# Altium PCB PCB1.PcbDoc
Units mm, origin at the board's own origin, x right, y up, seen from the top; angles counter-clockwise.
Board outline 48 x 48 mm, 4 copper layers (Top Copper, Signal Layer 1, Signal Layer 2, Bottom Copper), stack 1.57 mm thick; 134 components, 82 nets, 479 pads, 178 vias.
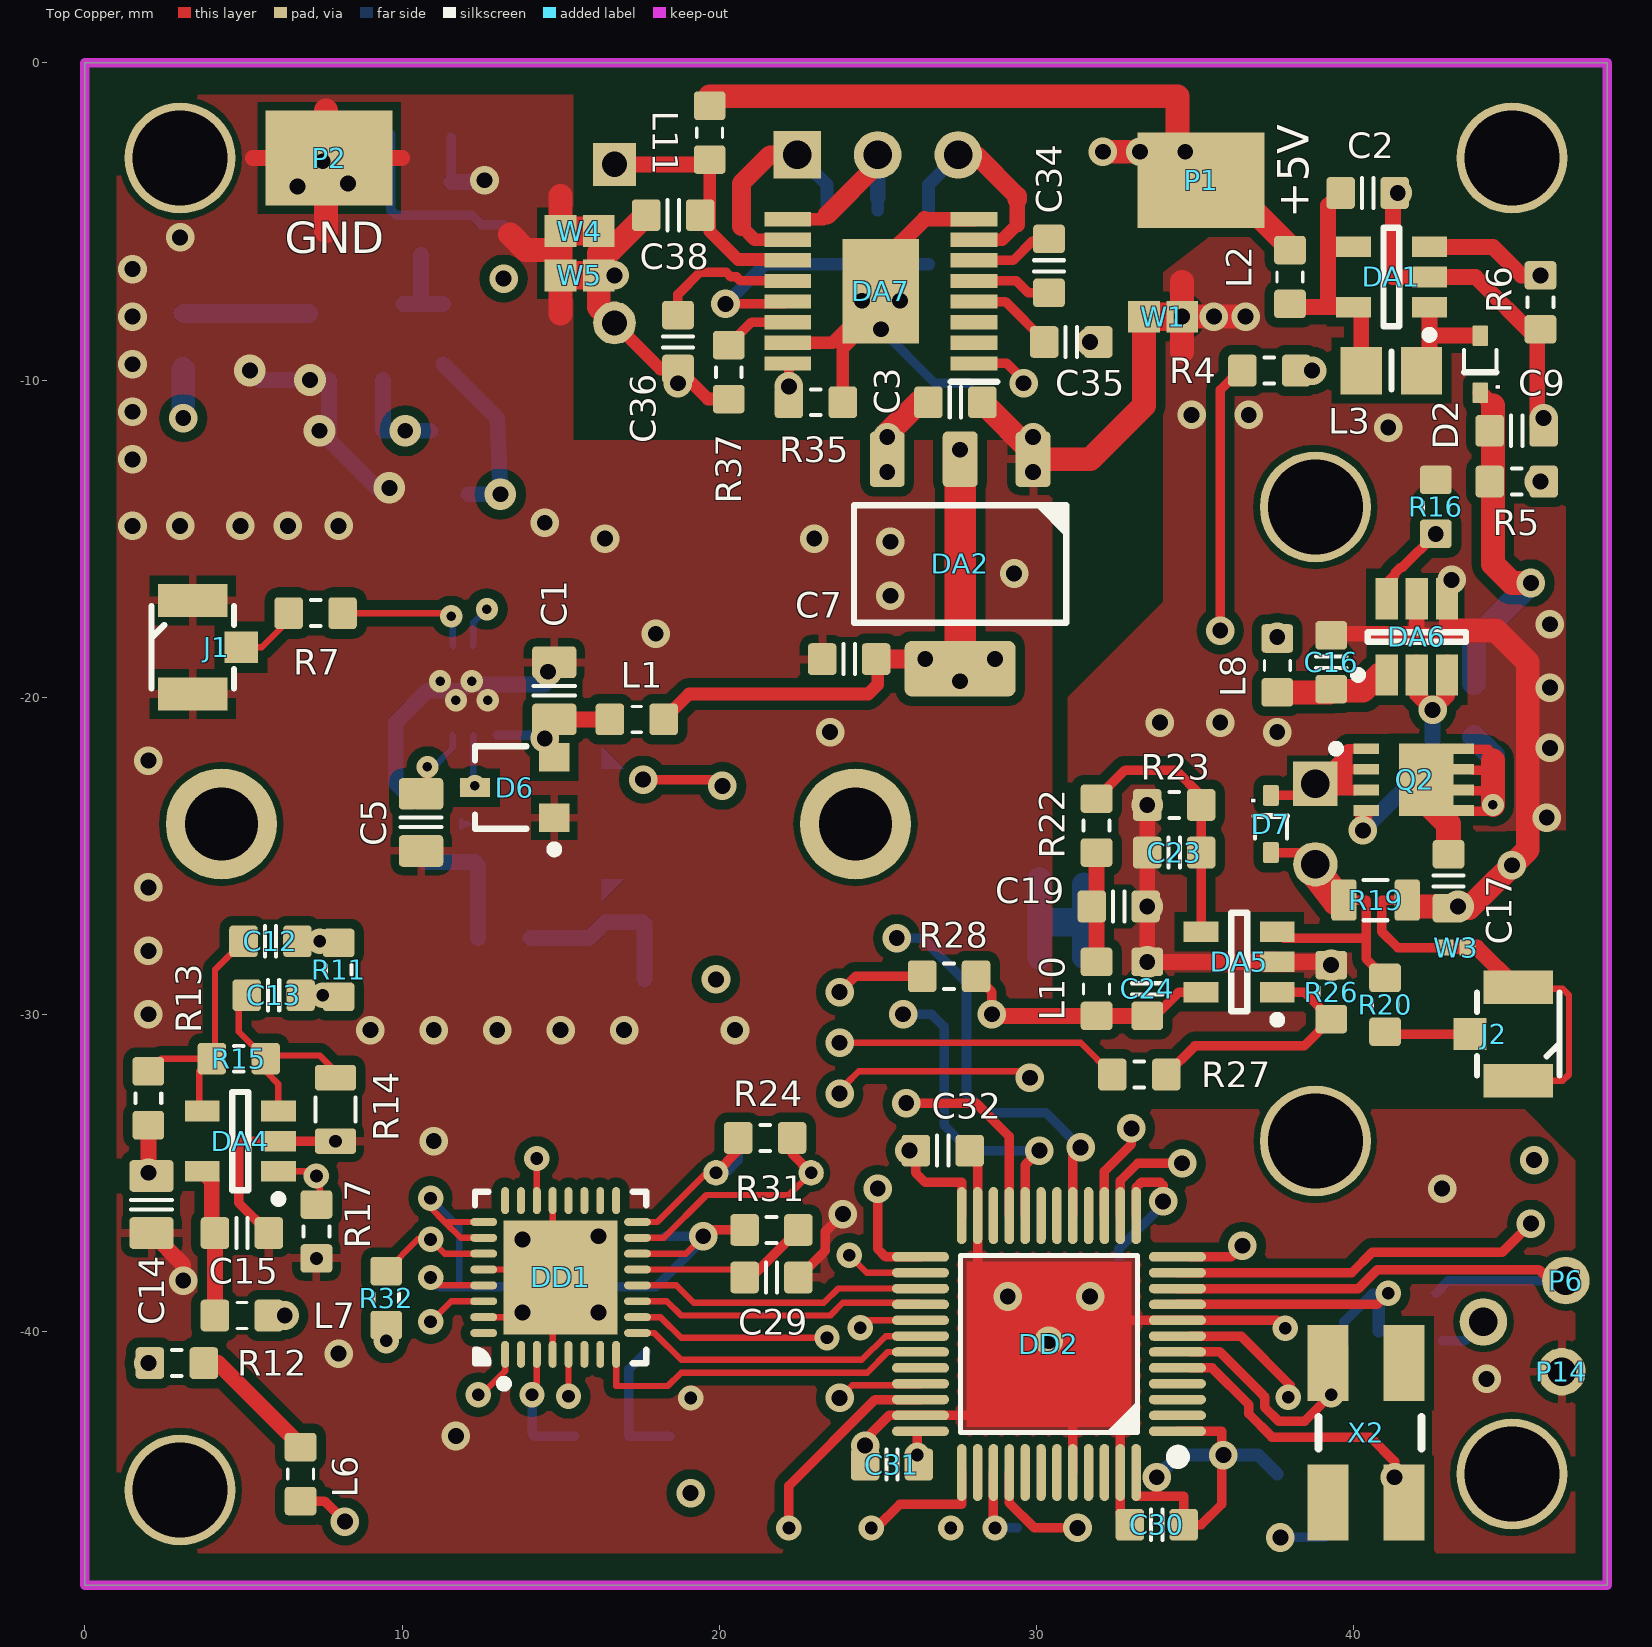
[diagram p0: Top Copper view]
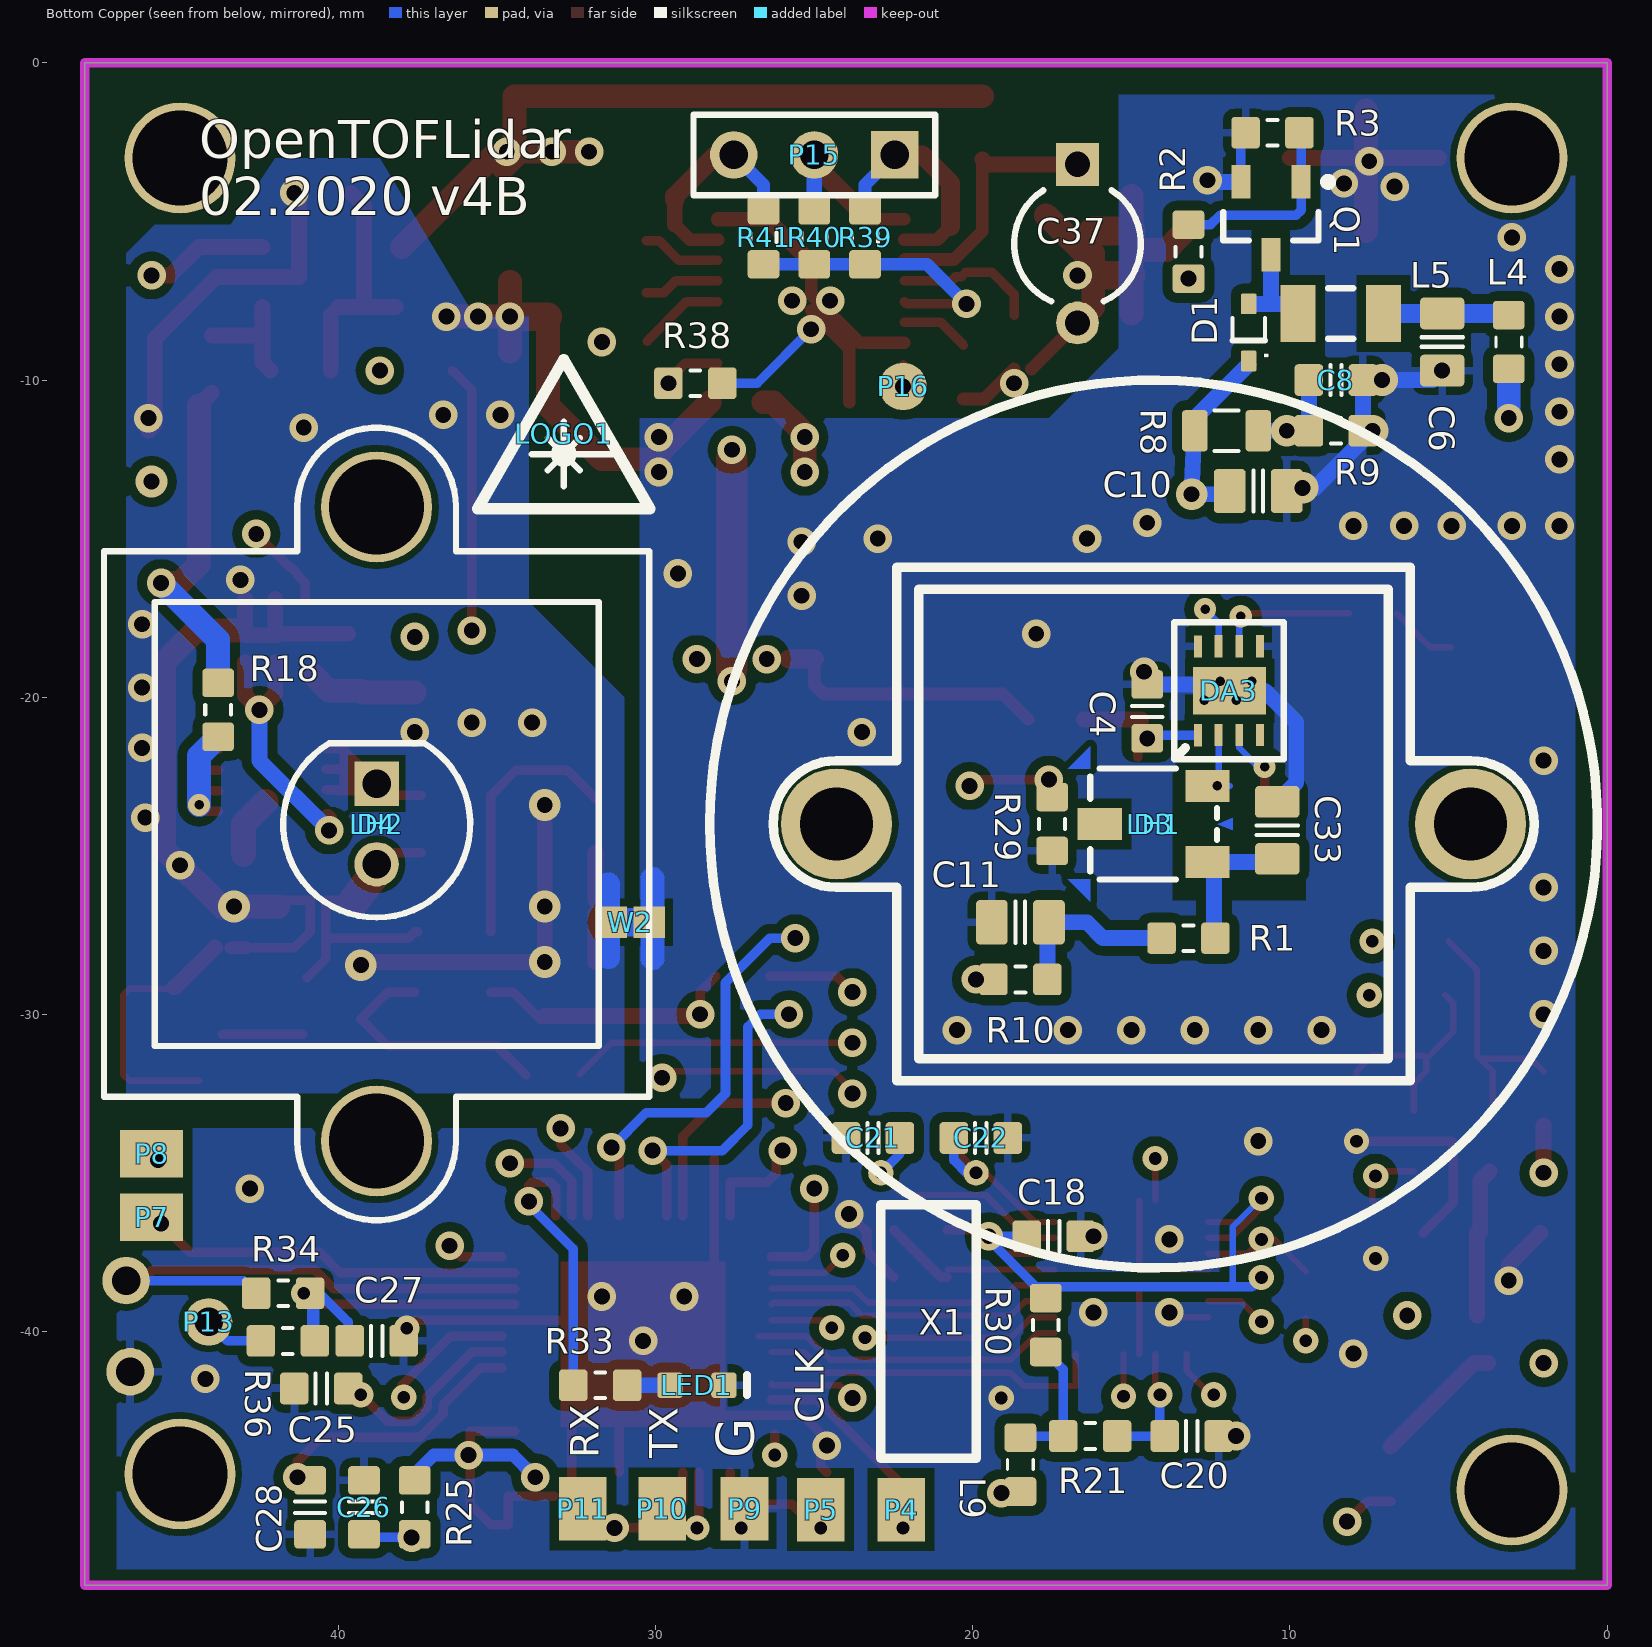
[diagram p1: Bottom Copper view, seen from below]
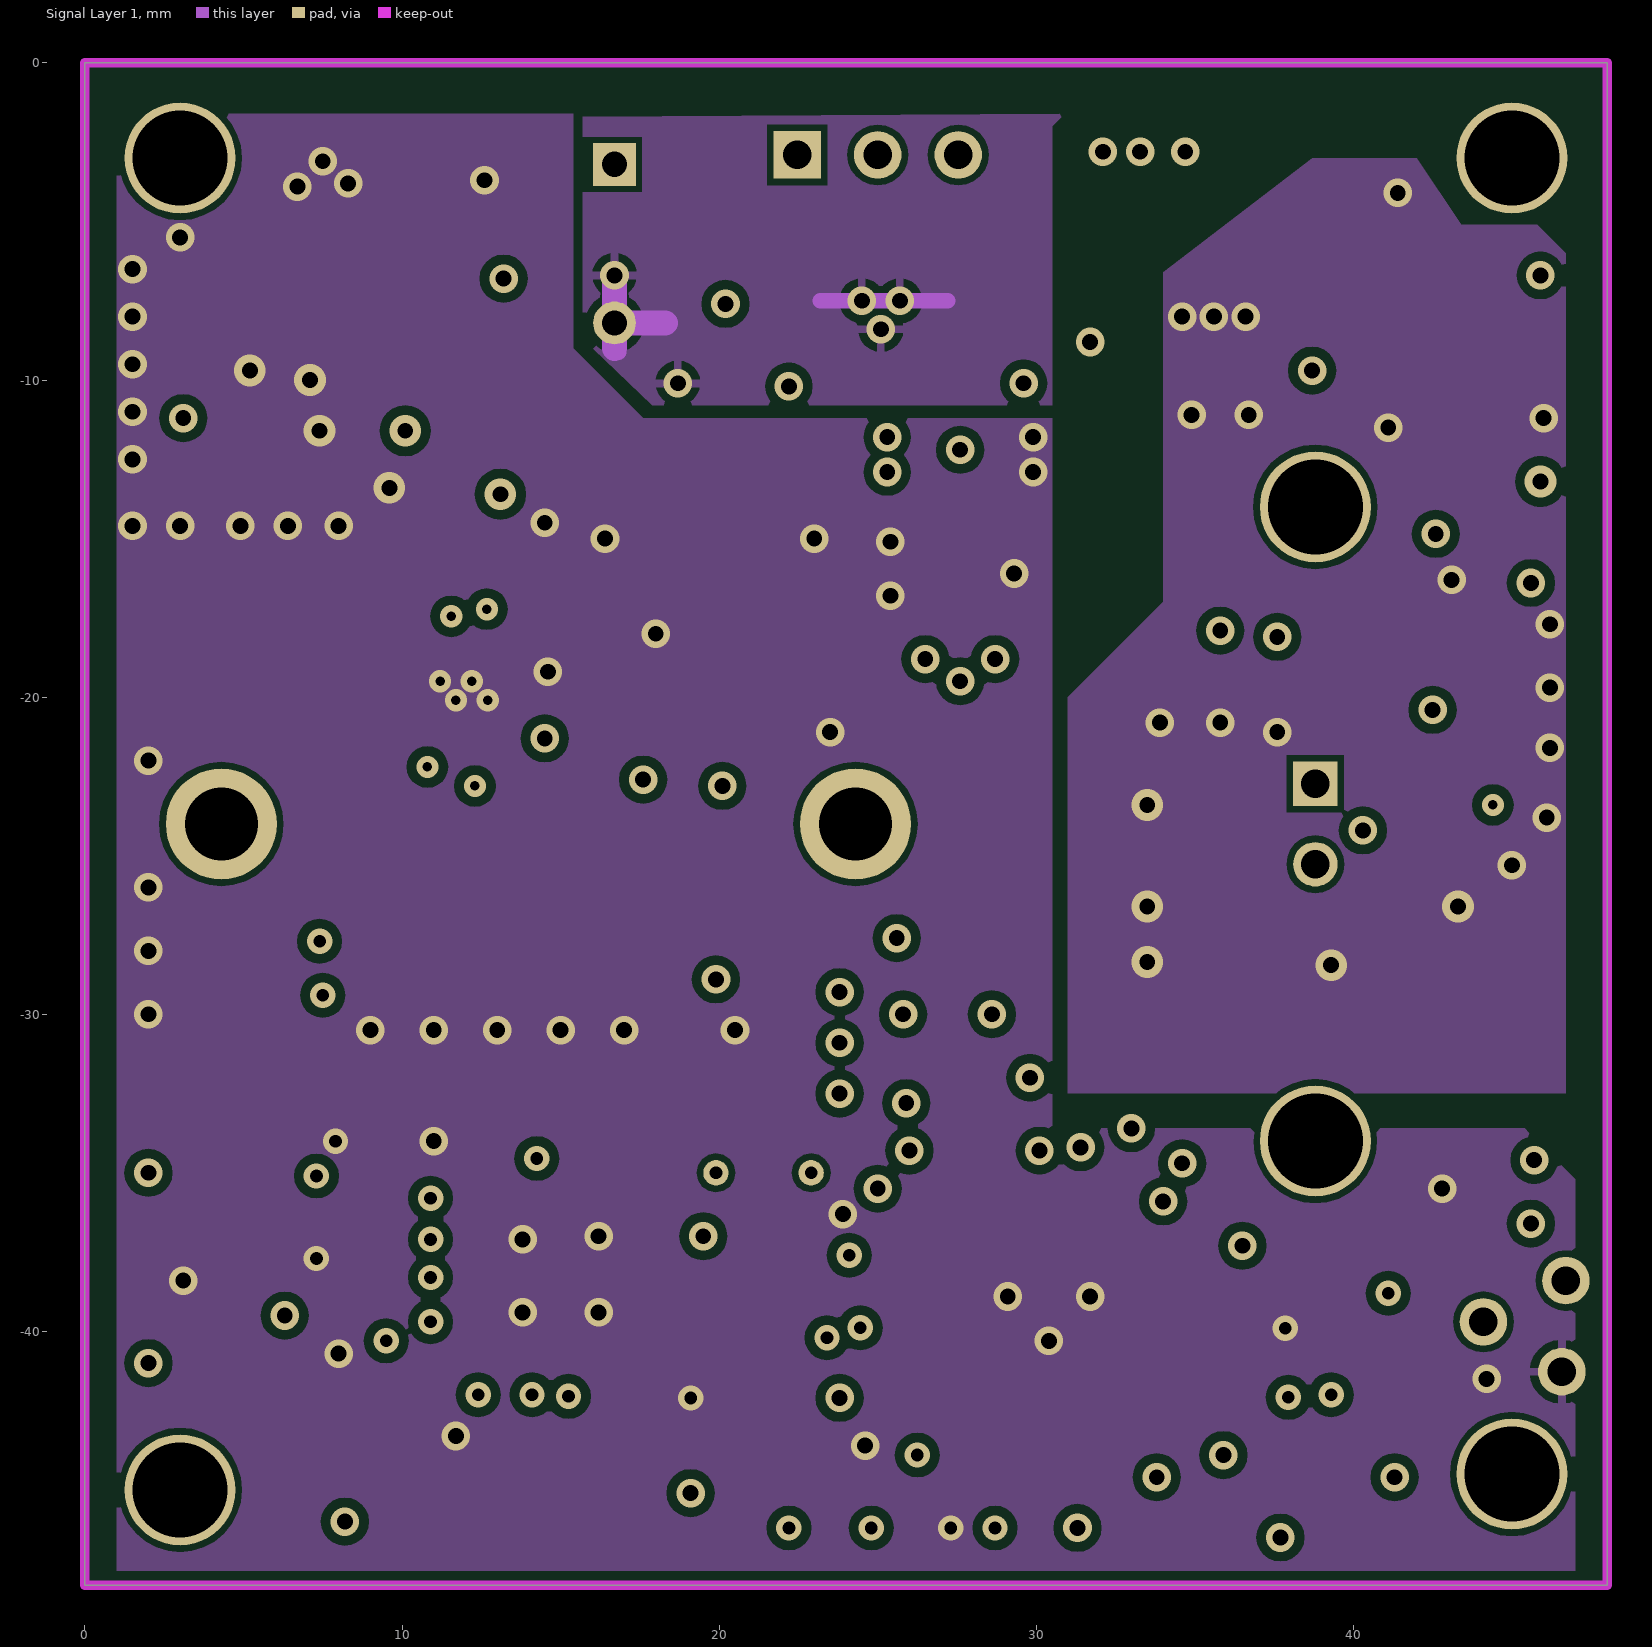
[diagram p2: Signal Layer 1]
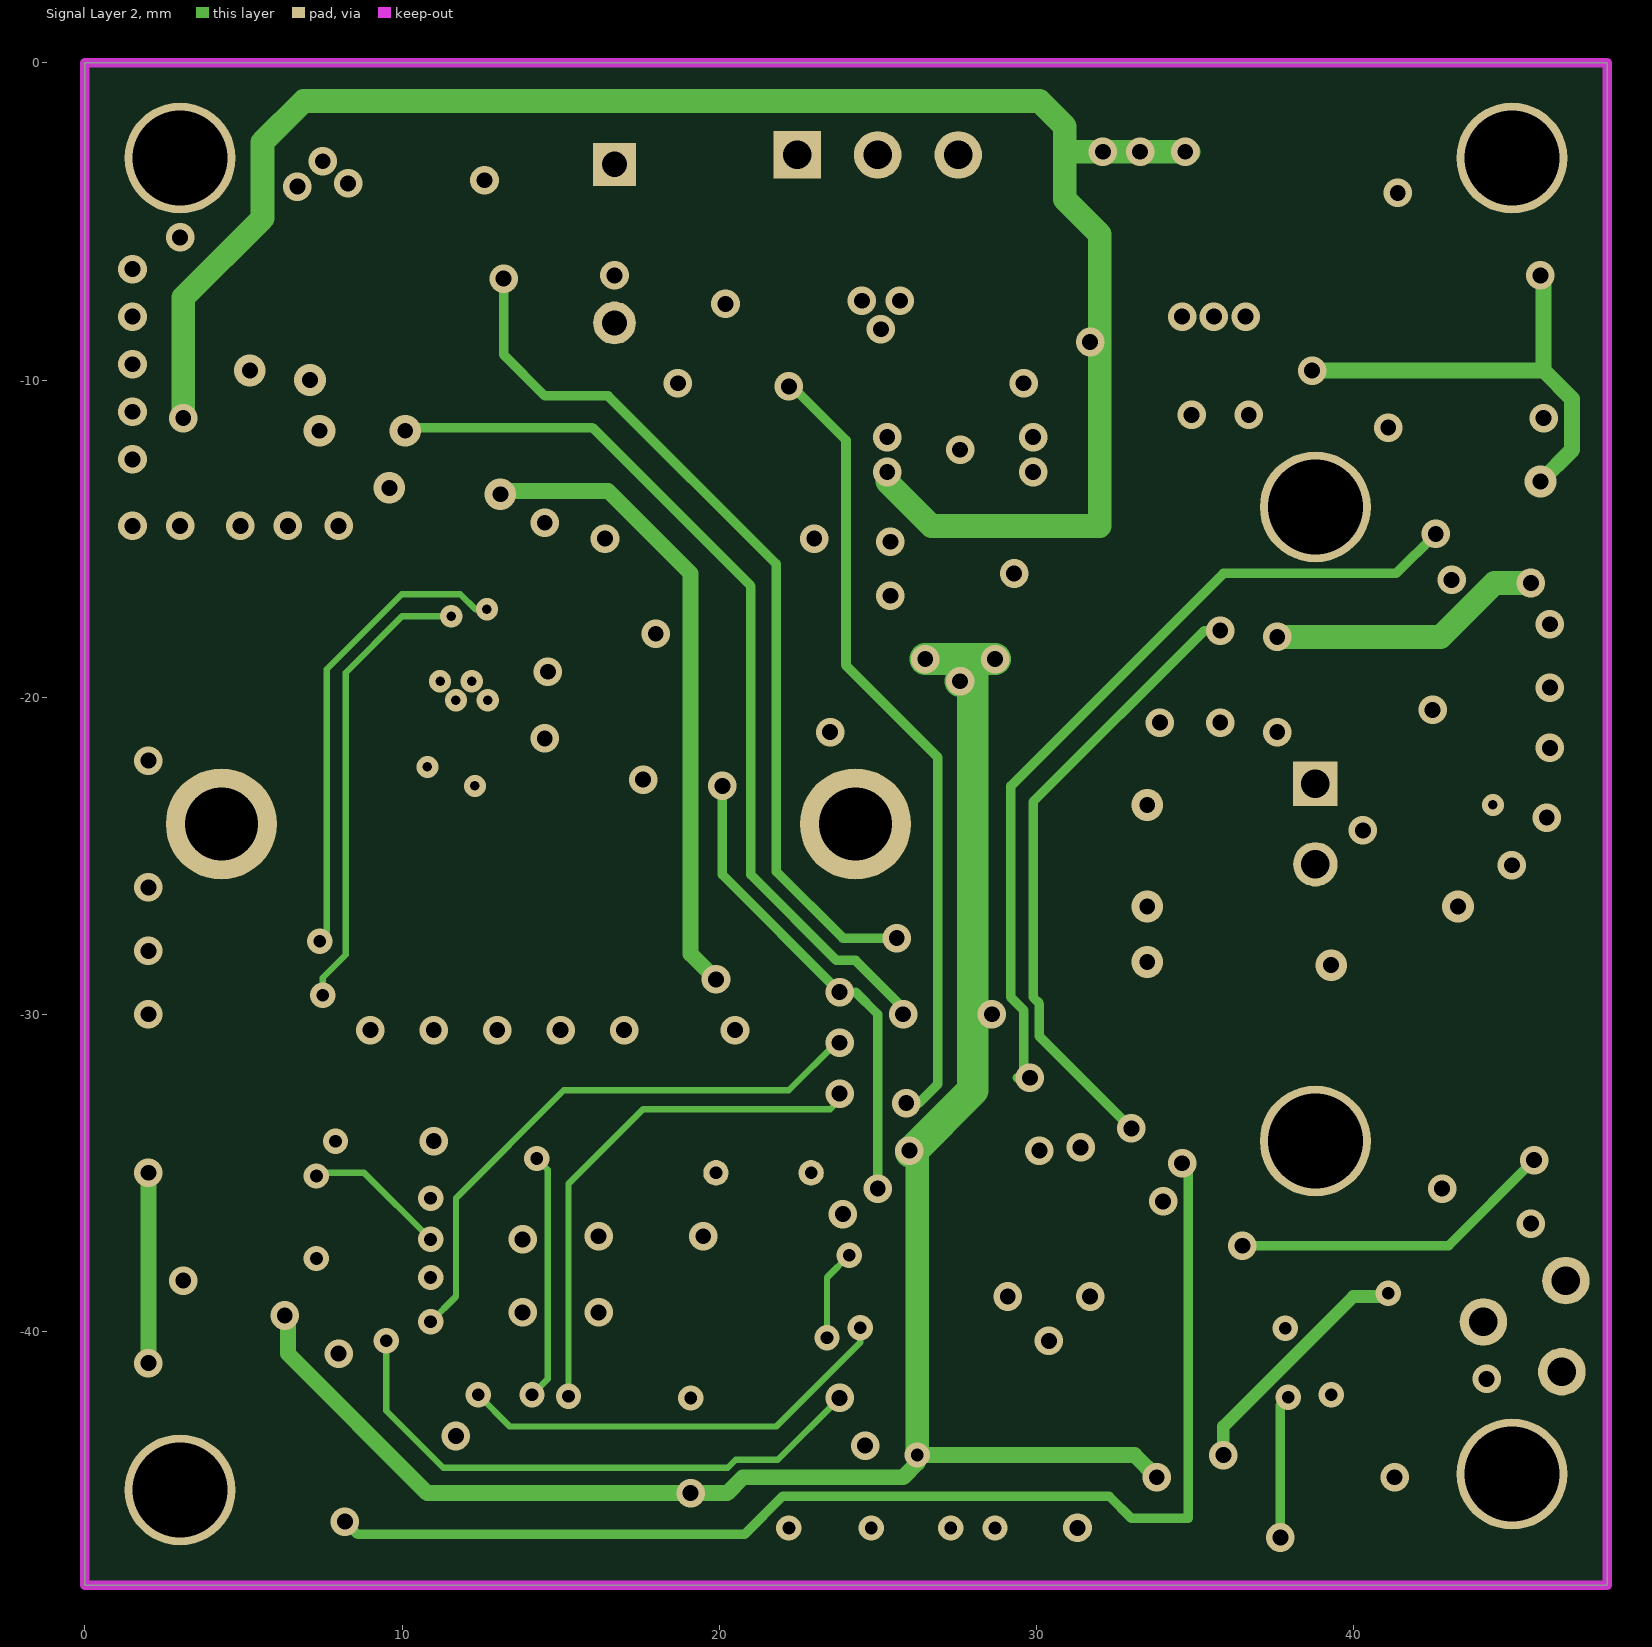
[diagram p3: Signal Layer 2]
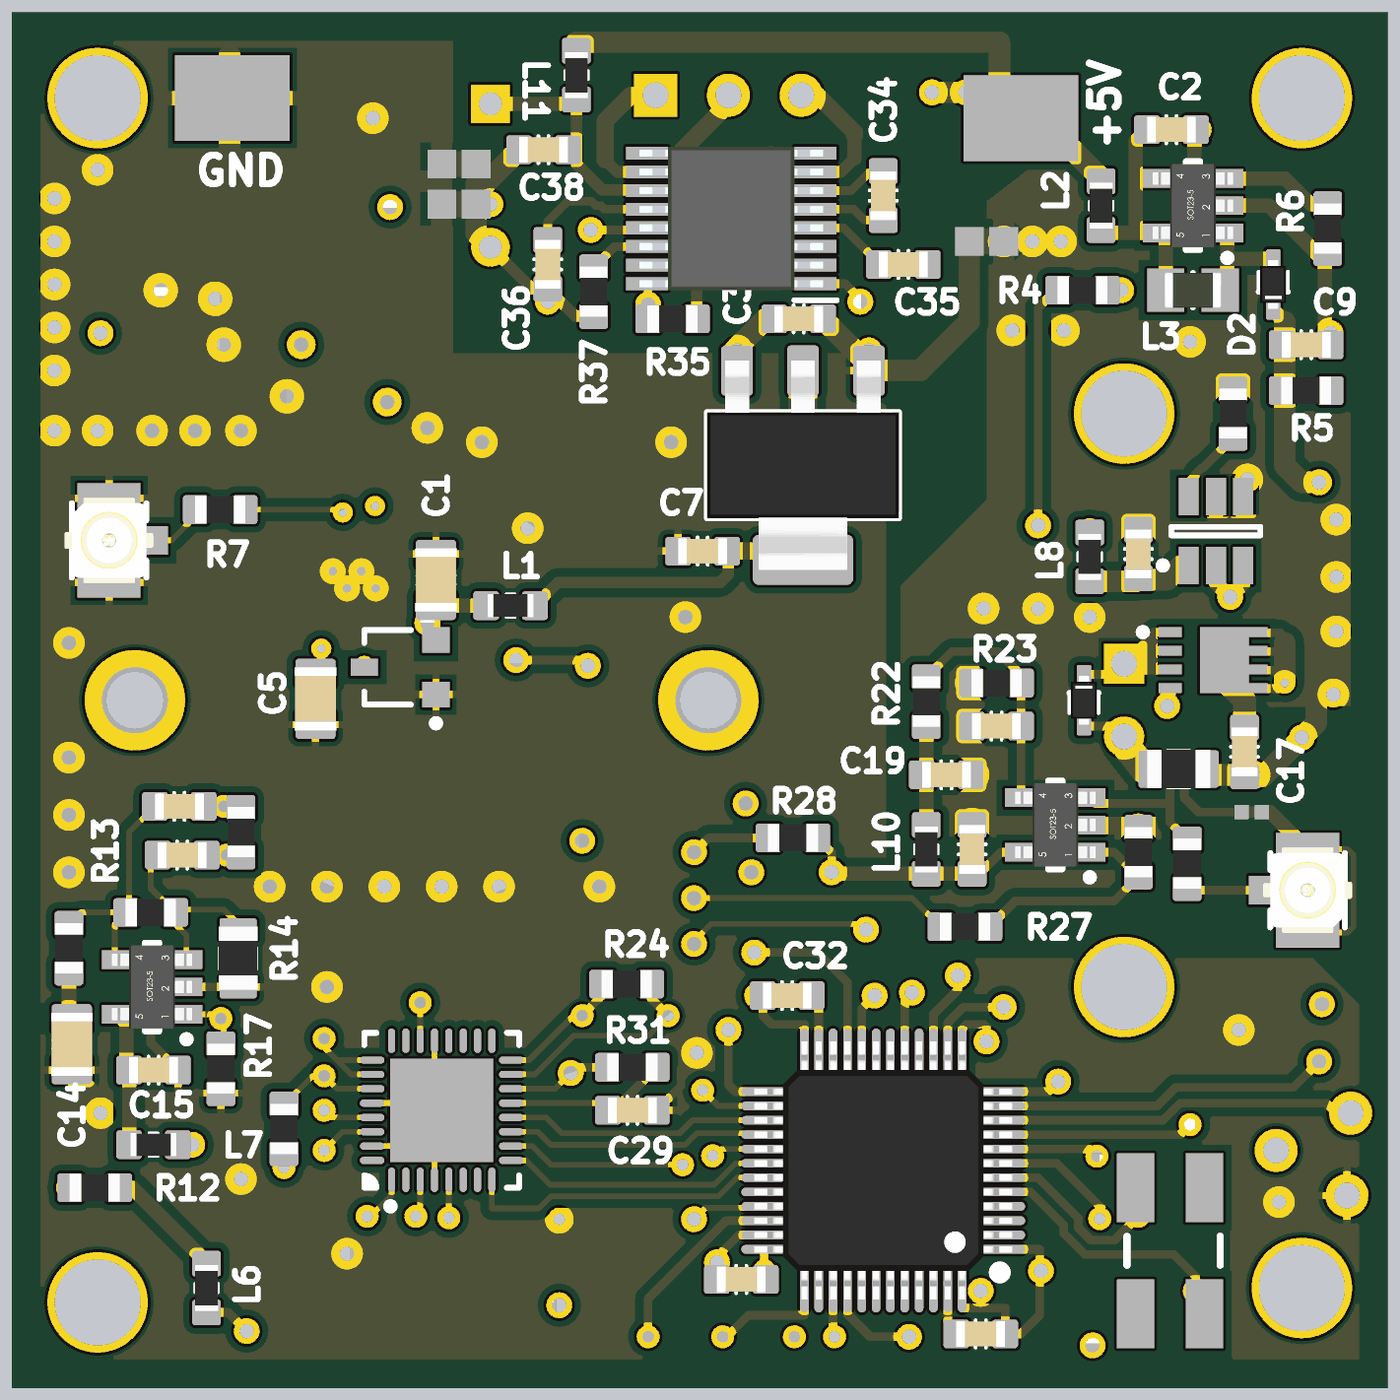
[diagram p4: 3D render of the assembled board from above, using the file's embedded part models]
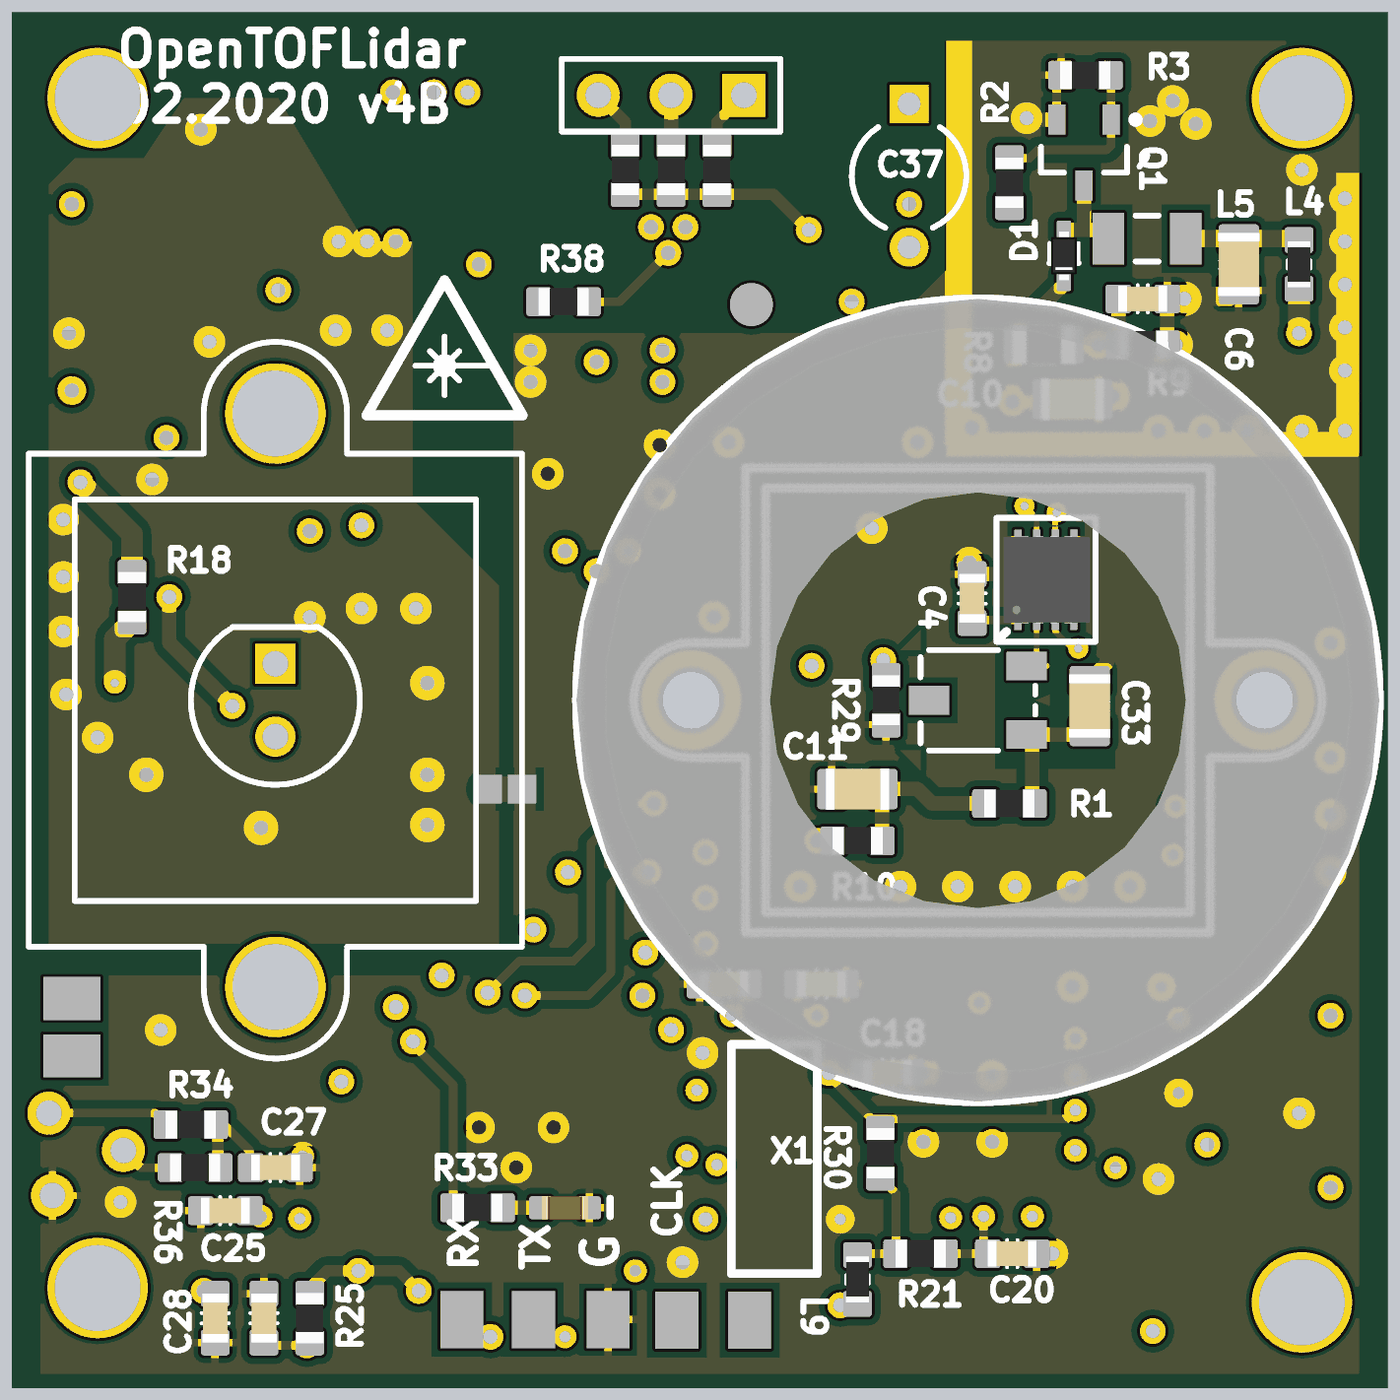
[diagram p5: 3D render of the assembled board from below, using the file's embedded part models]

## Layer stack, top to bottom
Top Mask: solder mask 0.015, Solder Resist, Dk 3.8
Top Copper: signal copper 0.035
Dielectric 1: prepreg 0.1, 2313, Dk 4.05
Signal Layer 1: signal copper 0.0175
Core: core 1.265, FR-4, Dk 4.5
Signal Layer 2: signal copper 0.0175
Dielectric 2: prepreg 0.1, 2313, Dk 4.05
Bottom Copper: signal copper 0.035
Bottom Mask: solder mask 0.015, Solder Resist, Dk 3.8

## Board outline
0,-48 48,-48 48,0 0,0

## Design rules (kind name [scope] priority, off if disabled: settings)
Clearance [All] p1: gap=0.2 except(0.3: Track-Poly SMDPad-Poly Via-Poly)
DiffPairsRouting [All] p1: maxlimit=0.254 minlimit=0.254 mostfreqgap=0.3 toplayer_minwidth=0.2 toplayer_maxwidth=0.5 toplayer_prefwidth=0.3 midlayer1_minwidth=0.2 midlayer1_maxwidth=0.5 midlayer1_prefwidth=0.3 midlayer2_minwidth=0.2 midlayer2_maxwidth=0.5 midlayer2_prefwidth=0.3 bottomlayer_minwidth=0.2 bottomlayer_maxwidth=0.5 bottomlayer_prefwidth=0.3 maxuncoupledlength=0.2
HoleSize [All] p1: absolutevalues=TRUE maxlimit=10 minlimit=0.3 maxpercent=80.000 minpercent=20.000
MinimumAnnularRing [All] p1: minimumring=0.19
PolygonConnect PolygonConnectGND [InNet('LGND')] p1: connectstyle=Direct reliefconductorwidth=0.254 reliefentries=4 polygonreliefangle="90 Angle" airgapwidth=0.254
PolygonConnect PolygonConnectGND2 [IsVia AND InNet('GND')] p2: connectstyle=Direct reliefconductorwidth=0.254 reliefentries=4 polygonreliefangle="90 Angle" airgapwidth=0.254
PolygonConnect PolygonConnect_1 [All] p3: connectstyle=Relief reliefconductorwidth=0.254 reliefentries=4 polygonreliefangle="90 Angle" airgapwidth=0.254
RoomDefinition Sheet1 [InComponentClass('Sheet1')] p1: confinementstyle=ConfineIn formatcopy=TRUE lockcomponents=FALSE outline -18.286,-70.225 40.769,-70.225 40.769,-58.541 -18.286,-58.541
RoutingVias [All] p1: holewidth=0.5 width=0.9 viastyle="Through Hole" minholewidth=0.3 minwidth=0.6 maxholewidth=10 maxwidth=12
SilkToSilkClearance [All] p1: silktosilkclearance=0.1
SolderMaskExpansion [All] p1: expansion=0.102
Width [All] p1: maxlimit=10 minlimit=0.2 preferedwidth=0.3
27 further rules are at their usual default settings.

## Classes and differential pairs
differential pair COMP: +COMP_P -COMP_N
differential pair OUT: +OUT_P -OUT_N

## Components (designator, comment, footprint, x,y, rotation, side; value= is the part's Value field where it differs from the comment)
C1 "1uF" CAPC2012X135N 14.8,-19.8 r270 top
C2 "10uF" CAPC1608X90N 40.45,-4.1 r180 top
C3 "100nF" CAPC1608X90N 27.45,-10.7 r180 top
C4 "100nF" CAPC1608X90N 14.5,-20.45 r270 bottom
C5 "1uF" CAPC2012X135N 10.6,-23.95 r90 top
C6 "1uF" CAPC2012X135N 5.2,-8.8 r270 bottom
C7 "2.2uF" CAPC1608X90N 24.1,-18.8 r0 top
C8 "100pF" CAPC1608X90N 8.55,-10 r180 bottom
C9 "10uF" CAPC1608X90N 45.15,-11.6 r180 top
C10 "10nF" CAPC2012X135N 11,-13.5 r0 bottom
C11 "10nF" CAPC2012X135N 18.5,-27.1 r180 bottom
C12 "10nF" CAPC1608X90N 5.85,-27.7 r0 top
C13 "10nF" CAPC1608X90N 5.95,-29.4 r0 top
C14 "1uF" CAPC2012X135N 2.1,-36 r270 top
C15 "100nF" CAPC1608X90N 4.95,-36.9 r0 top
C16 "10uF" CAPC1608X90N 39.3,-18.9 r270 top
C17 "20nF" CAPC1608X90N 43,-25.8 r90 top
C18 "10uF" CAPC1608X90N 17.45,-37 r0 bottom
C19 "1uF" CAPC1608X90N 32.6,-26.6 r180 top
C20 "10uF" CAPC1608X90N 13.1,-43.3 r0 bottom
C21 "10pF" CAPC1608X90N 23.15,-33.9 r180 bottom
C22 "10pF" CAPC1608X90N 19.75,-33.9 r0 bottom
C23 "100nF" CAPC1608X90N 34.35,-24.9 r0 top
C24 "100nF" CAPC1608X90N 33.5,-29.2 r270 top
C25 "10pF" CAPC1608X90N 40.55,-41.8 r0 bottom
C26 "100nF" CAPC1608X90N 39.2,-45.55 r270 bottom
C27 "100nF" CAPC1608X90N 38.8,-40.3 r0 bottom
C28 "10pF" CAPC1608X90N 40.9,-45.55 r270 bottom
C29 "100nF" CAPC1608X90N 21.65,-38.3 r180 top
C30 "100nF" CAPC1608X90N 33.8,-46.1 r0 top
C31 "100nF" CAPC1608X90N 25.45,-44.2 r0 top
C32 "100nF" CAPC1608X90N 27.05,-34.3 r180 top
C33 "10nF" CAPC2012X135N 10.4,-24.2 r270 bottom
C34 "100nF" CAPC1608X90N 30.4,-6.4 r90 top
C35 "100nF" CAPC1608X90N 31.1,-8.8 r180 top
C36 "2.2uF" CAPC1608X90N 18.7,-8.8 r90 top
C37 "Cap2" CAPR5-4X5 16.7,-5.7 r270 bottom
C38 "1uF" CAPC1608X90N 18.55,-4.8 r180 top
D1 "BAS521" SOD523F 11.3,-8.5 r90 bottom
D2 "BAS5202" SOD523F 44,-9.5 r90 top
D3 "MTAPD-07" LCC3 14.3,-24 r90 bottom locked (schematic designator D1)
D4 "Laser SPL PL90_3" SPL_PL90 38.8,-24 r270 bottom locked
D6 "BAV99" SOT-23 13.55,-22.85 r90 top
D7 "BAS5202" SOD523F 37.4,-24 r270 top
DA1 "MIC2288YD5-TR" SOT23-5 41.2,-6.75 r180 top
DA2 "LD1117S33TR" SOT223 27.6,-15.8 r270 top
DA3 "MAX3658" TDFN-8_0.65 12.9,-19.8 r90 bottom
DA4 "ADCMP600" SOT23-5 4.9,-34 r180 top
DA5 "ADCMP600" SOT23-5 36.4,-28.35 r180 top
DA6 "UCC27511DBVR" SOT23-6_M 42,-18.1 r90 top
DA7 "DRV11873PWPR" SOP65P640X120-17N 25.1,-7.2 r180 top
DD1 "TDC-GP21" "QFN32 5x5mm" 15,-38.3 r90 top
DD2 "STM32F303CBT6" LQFP-48_N 30.4,-40.4 r180 top locked
J1 "U.FL" "TE C-1909763" 3.4,-18.425 r90 top
J2 "U.FL" "TE C-1909763" 45.2,-30.625 r270 top
L1 "BEAD" INDC1608N 17.4,-20.7 r180 top
L2 "BEAD" INDC1608N 38,-6.75 r90 top
L3 "Inductor" V0805HD 41.2,-9.7 r0 top
L4 "BEAD" INDC1608N 3.1,-8.8 r90 bottom
L5 "Inductor" INDC3216 8.4,-7.9 r0 bottom
L6 "BEAD" INDC1608N 6.8,-44.5 r90 top
L7 "BEAD" INDC1608N 4.95,-39.5 r180 top
L8 "BEAD" INDC1608N 37.6,-19 r270 top
L9 "BEAD" INDC1608N 18.5,-44.2 r270 bottom
L10 "BEAD" INDC1608N 31.9,-29.2 r90 top
L11 "BEAD" INDC1608N 19.7,-2.2 r270 top
LED1 "LED" LED_0603 28.7,-41.7 r180 bottom
LH1 "CS Lens Holder" "Lens Holder CS" 14.3,-24 r180 bottom locked
LH2 "Lens Holder" LENS_HOLDER_20MM_ADJ 38.8,-24 r90 bottom locked
LOGO1 "LASER RADIATION" LaserWarning_Small 32.9,-11.7 r180 bottom
P1 "Power pad" Ext_power_pad 33.2,-3.7 r90 top
P2 "Power pad" Ext_power_pad 5.7,-3 r90 top
P4 "Pad" Ext_pad_2 22.26,-44.12 r180 bottom
P5 "Pad" Ext_pad_2 24.8,-44.12 r180 bottom
P6 "Pad" Ext_hole 46.7,-38.4 r0 top
P7 "Pad" Ext_pad_2 44.4,-36.4 r270 bottom
P8 "Pad" Ext_pad_2 44.4,-34.4 r270 bottom
P9 "Pad" Ext_pad_2 27.2,-44.1 r180 bottom
P10 "Pad" Ext_pad_2 29.8,-44.1 r180 bottom
P11 "Pad" Ext_pad_2 32.3,-44.1 r180 bottom
P13 "Pad" Ext_hole 44.1,-39.7 r270 bottom
P14 "Pad" Ext_hole 46.573,-41.273 r0 top
P15 "Motor" HDR1X3 22.46,-2.9 r0 bottom
P16 "Pad" Ext_pad_small 22.2,-8.7 r180 bottom
Q1 "BSS131" INF-PG-SOT23_N 10.6,-4.9 r270 bottom
Q2 "BSZ165N04NS G" INF-PG-TSDSON-8-1_A_V 41.942,-22.6 r180 top
R1 "1K" RESC1608X55N 13.2,-27.6 r0 bottom
R2 "47" RESC1608X55N 13.2,-5.95 r90 bottom
R3 "47K" RESC1608X55N 10.55,-2.2 r0 bottom
R4 "10K" RESC1608X55N 37.35,-9.7 r0 top
R5 "47K" RESC1608X55N 45.15,-13.2 r180 top
R6 "4.7K" RESC1608X55N 45.9,-7.55 r90 top
R7 "47" RESC1608X55N 7.275,-17.35 r0 top
R8 "2M" RESC2012X70N 12,-11.6 r0 bottom
R9 "20K" RESC1608X55N 8.55,-11.6 r180 bottom
R10 "4.7K" RESC1608X55N 18.5,-28.9 r0 bottom
R11 "NC" RESC1608X55N 8,-28.6 r90 top
R12 "82" RESC1608X55N 2.9,-41 r0 top
R13 "4.7K" RESC1608X55N 2,-32.65 r270 top
R14 "20K" RESC2012X70N 7.9,-33 r90 top
R15 "1K" RESC1608X55N 4.85,-31.4 r180 top
R16 "1K" RESC1608X55N 42.6,-14 r270 top
R17 "1K" RESC1608X55N 7.3,-36.85 r90 top
R18 "270" RESC1608X55N 43.8,-20.4 r90 bottom
R19 "0.1" RESC2012X70N 40.7,-26.4 r180 top
R20 "0" RESC1608X55N 41,-29.7 r90 top
R21 "22" RESC1608X55N 16.3,-43.3 r180 bottom
R22 "100K" RESC1608X55N 31.9,-24.05 r90 top
R23 "4.7K" RESC1608X55N 34.35,-23.4 r180 top
R24 "10M" RESC1608X55N 21.45,-33.9 r0 top
R25 "10K" RESC1608X55N 37.6,-45.55 r270 bottom
R26 "1K" RESC1608X55N 39.3,-29.3 r270 top
R27 "0" RESC1608X55N 33.25,-31.9 r180 top
R28 "10K" RESC1608X55N 27.25,-28.8 r180 top
R29 "10K NTC" RESC1608X55N 17.5,-24 r90 bottom
R30 "0" RESC1608X55N 17.7,-39.8 r90 bottom
R31 "4.7k" RESC1608X55N 21.65,-36.8 r0 top
R32 "NC" RESC1608X55N 9.5,-38.95 r90 top
R33 "1K" RESC1608X55N 31.75,-41.7 r0 bottom
R34 "NC" RESC1608X55N 41.75,-38.8 r0 bottom
R35 "4.7K" RESC1608X55N 23.05,-10.7 r0 top
R36 "0" RESC1608X55N 41.6,-40.3 r0 bottom
R37 "3.3K" RESC1608X55N 20.3,-9.75 r270 top
R38 "0" RESC1608X55N 28.75,-10.1 r180 bottom
R39 "1K" RESC1608X55N 23.4,-5.5 r270 bottom
R40 "1K" RESC1608X55N 25,-5.5 r270 bottom
R41 "1K" RESC1608X55N 26.6,-5.5 r270 bottom
W1 "NET connector" "Net connector" 34,-8 r180 top net-tie
W2 "NET connector" "Net connector" 30.8,-27.1 r180 bottom net-tie
W3 "NET connector" "Net connector2" 43.3,-27.9 r0 top net-tie
W4 "NET connector" "Net connector" 15.6,-5.3 r0 top net-tie
W5 "NET connector" "Net connector" 15.6,-6.7 r0 top net-tie
X1 "32kHz" QUARTZ_32K 19.9,-35 r90 bottom
X2 "Quartz" "SX-6 QUARTZ" 40.4,-43.2 r270 top

## Footprints (in the part's own frame and the unit in brackets; to place one, negate y for a bottom-side part, rotate by r counter-clockwise, add the part's x,y. Pads: shape width x height; smd on the part's side, far side on the other; paste and mask are expansions set on the pad)
CAPC1608X90N [mm] "Chip Capacitor, Body 1.6x0.8mm, EIA 0603, IPC Medium Density"
  round 0.254 on Mech15: 0(0,0)
  rrect25% 0.9x1 smd: 1(-0.85,0) 2(0.85,0)
  Top Copper pour cut-out: -0.6,0.5 -0.4,0.7 0.4,0.7 0.6,0.5 0.6,-0.5 0.4,-0.7 -0.4,-0.7 -0.6,-0.5
  silkscreen extent -0.18,-0.48 0.18,0.48, body extent -0.85,-0.45 0.85,0.45, height 0.89
CAPC2012X135N [mm] "Chip Capacitor, Body 2.0x1.2mm, EIA 0805, IPC Medium Density"
  round 0.254 on Mech15: 0(0,0)
  rrect25% 1x1.4 smd: 1(-0.9,0) 2(0.9,0)
  Top Copper pour cut-out: -0.675,0.7 -0.475,0.9 0.475,0.9 0.675,0.7 0.675,-0.7 0.475,-0.9 -0.475,-0.9 -0.675,-0.7
  silkscreen extent -0.15,-0.65 0.15,0.65, body extent -1.1,-0.72 1.1,0.73, height 1.34
CAPR5-4X5 [mm] "Capacitor; 2 Leads"
  rect 1.35x1.35 hole 0.8: 1(-2.5,0)
  round 1.35 hole 0.8: 2(2.5,0)
  silkscreen extent -1.69,-2 1.82,2
Ext_hole [mm] "Hole for wire (0.6)"
  round 1.5 hole 0.9: 1(0,0)
Ext_pad_2 [mm] "Pad for wire(1.5x2)"
  rect 1.5x2 smd: 1(0,-1.5)
Ext_pad_small [mm] "Pad for wire(1.5mm round)"
  round 1.5 smd: 1(0,-1.5)
Ext_power_pad [mm] "Pad for wire(4x3)"
  rect 3x4 smd: 1(0,-2)
HDR1X3 [mm] "Connector; Header; 3 Position"
  rect 1.5x1.5 hole 0.9: 1(0,0)
  round 1.5 hole 0.9: 2(2.54,0) 3(5.08,0)
  silkscreen extent -1.27,-1.27 6.35,1.27
INDC1608N [mm] "Chip bead, Body 1.6x0.8mm, 0603, IPC Medium Density"
  round 0.254 on Mech15: 0(0,0)
  rrect25% 0.9x1 smd: 1(-0.85,0) 2(0.85,0)
  Top Copper pour cut-out: -0.4,0.6 0.4,0.6 0.4,-0.6 -0.4,-0.6
  silkscreen extent -0.15,-0.41 0.15,0.41, body extent -0.8,-0.4 0.8,0.4, height 0.79
INDC3216 [mm] "Chip Inductor, Body 3.2x1.6mm, IPC High Density"
  rect 1.1x1.8 smd: 1(-1.35,0) 2(1.35,0)
  silkscreen extent -0.4,-0.8 0.4,0.8, body extent -1.7,-0.9 1.7,0.9, height 0.55
INF-PG-SOT23_N [mm] "SOT23, 3-Leads, Body 2.9x1.3mm, Pitch 0.95mm, IPC Medium Density"
  rect 1.05x0.6 smd: 1(-1.15,0.95) 2(-1.15,-0.95) 3(1.15,0)
  silkscreen extent -1.27,-1.5 0.7,1.92, body extent -0.7,-1.5 0.7,1.5, height 1.1
INF-PG-TSDSON-8-1_A_V [mm] "TSDSON, 8-Leads, Body 3.3x3.3mm, Pitch 0.65mm"
  rect 0.8x0.34 smd: 1(1.538,-0.975) 2(1.538,-0.325) 3(1.538,0.325) 4(1.538,0.975)
  rect 0.65x0.34 smd: 5(-1.538,0.975) 6(-1.538,0.325) 7(-1.538,-0.325) 8(-1.538,-0.975)
  rect 1.71x2.29 smd: 8(-0.358,0)
  silkscreen extent 2.36,-1.1 2.61,-0.85, body extent -1.65,-1.65 1.65,1.65, height 1
LaserWarning_Small [mm]
  silkscreen extent -2.72,-2.36 2.72,2.35
LCC3 [mm] "LCC3 APD"
  rect 1x1.4 smd: A(1.2,-1.7) C(-1.2,-1.7) NC(0,1.7)
  Top Copper region: -0.2,-2.5 0,-2 0.2,-2.5
  Top Copper region: 1.75,2 1.75,2.7 2.45,2
  Top Copper region: -1.75,2 -1.75,2.7 -2.45,2
  silkscreen extent -1.75,-2 1.75,2, body extent -1.7,-2 1.7,2, height 1
LED_0603 [mm] "LED_0603"
  round 0.254 on Mech15: 0(0,0)
  rrect25% 0.8x0.8 smd: 1(-0.85,0) 2(0.85,0)
  Top Copper pour cut-out: -0.5,0.5 0.5,0.5 0.5,-0.5 -0.5,-0.5
  silkscreen extent 1.58,-0.3 1.58,0.33, body extent -0.8,-0.4 0.8,0.4, height 0.75
"Lens Holder CS" [mm]
  round 3.5 hole 2.3: M2(-10,0) M2(10,0)
  silkscreen extent -14,-14 14,14, body extent -14,-14 14,14, height 14.7
LENS_HOLDER_20MM_ADJ [mm] "Holder for M12 lens 20mm"
  round 3.5 hole 3: M2(-10,0) M2(10,0)
  silkscreen extent -12.5,-8.6 12.5,8.6
LQFP-48_N [mm] "Thin QFP, 48-Leads, Body 7x7mm, Pitch 0.5mm, IPC Medium Density"
  round 1 on Mech15: 0(0,0)
  oval 1.8x0.3 smd: 1(-4.05,2.75) 2(-4.05,2.25) 3(-4.05,1.75) 4(-4.05,1.25) 5(-4.05,0.75) 6(-4.05,0.25) 7(-4.05,-0.25) 8(-4.05,-0.75) 9(-4.05,-1.25) 10(-4.05,-1.75) 11(-4.05,-2.25) 12(-4.05,-2.75) 25(4.05,-2.75) 26(4.05,-2.25) 27(4.05,-1.75) 28(4.05,-1.25) 29(4.05,-0.75) 30(4.05,-0.25) 31(4.05,0.25) 32(4.05,0.75) 33(4.05,1.25) 34(4.05,1.75) 35(4.05,2.25) 36(4.05,2.75)
  oval 0.3x1.8 smd: 13(-2.75,-4.05) 14(-2.25,-4.05) 15(-1.75,-4.05) 16(-1.25,-4.05) 17(-0.75,-4.05) 18(-0.25,-4.05) 19(0.25,-4.05) 20(0.75,-4.05) 21(1.25,-4.05) 22(1.75,-4.05) 23(2.25,-4.05) 24(2.75,-4.05) 37(2.75,4.05) 38(2.25,4.05) 39(1.75,4.05) 40(1.25,4.05) 41(0.75,4.05) 42(0.25,4.05) 43(-0.25,4.05) 44(-0.75,4.05) 45(-1.25,4.05) 46(-1.75,4.05) 47(-2.25,4.05) 48(-2.75,4.05)
  silkscreen extent -4.25,-2.79 2.79,3.75, body extent -4.5,-4.5 4.5,4.5, height 1.59
"Net connector" [mm]
  rect 1x1 smd mask+0: 1(-0.6,0) 2(0.6,0)
  Top Copper lines w0.9: 0.6,0 -0.6,0
"Net connector2" [mm]
  rect 0.5x0.5 smd mask+0: 1(-0.4,0) 2(0.3,0)
  Top Copper lines w0.4: -0.4,0 0.1,0
"QFN32 5x5mm" [mm] "HVQFN, 32-Leads, Body 5.00x5.00mm, Pitch 0.50mm, Thermal Pad 3.60x3.60mm, IPC Medium Density"
  oval 0.85x0.25 smd: 1(-2.425,1.75) 2(-2.425,1.25) 3(-2.425,0.75) 4(-2.425,0.25) 5(-2.425,-0.25) 6(-2.425,-0.75) 7(-2.425,-1.25) 8(-2.425,-1.75) 17(2.425,-1.75) 18(2.425,-1.25) 19(2.425,-0.75) 20(2.425,-0.25) 21(2.425,0.25) 22(2.425,0.75) 23(2.425,1.25) 24(2.425,1.75)
  oval 0.25x0.85 smd: 9(-1.75,-2.425) 10(-1.25,-2.425) 11(-0.75,-2.425) 12(-0.25,-2.425) 13(0.25,-2.425) 14(0.75,-2.425) 15(1.25,-2.425) 16(1.75,-2.425) 25(1.75,2.425) 26(1.25,2.425) 27(0.75,2.425) 28(0.25,2.425) 29(-0.25,2.425) 30(-0.75,2.425) 31(-1.25,2.425) 32(-1.75,2.425)
  rect 3.6x3.6 smd: 33(0,0)
  silkscreen extent -3.47,-2.7 2.7,2.7, body extent -2.55,-2.55 2.55,2.55, height 0.85
QUARTZ_32K [mm]
  round 0.8 hole 0.4: 1(0,3) 2(0,0)
  silkscreen extent -9,0 -1,3, body extent -9,-0.1 -1,2.9, height 3.3
RESC1608X55N [mm] "Chip Resistor, Body 1.6x0.8mm, EIA 0603, IPC Medium Density"
  round 0.254 on Mech15: 0(0,0)
  rrect25% 0.9x1 smd: 1(-0.85,0) 2(0.85,0)
  Top Copper pour cut-out: -0.6,0.5 -0.4,0.7 0.4,0.7 0.6,0.5 0.6,-0.5 0.4,-0.7 -0.4,-0.7 -0.6,-0.5
  silkscreen extent -0.15,-0.41 0.15,0.41, body extent -0.87,-0.47 0.88,0.48, height 0.54
RESC2012X70N [mm] "Chip Resistor, Body 2.0x1.2mm, EIA 0805, IPC Medium Density"
  round 0.254 on Mech15: 0(0,0)
  rrect25% 0.8x1.3 smd: 1(-1,0) 2(1,0)
  Top Copper pour cut-out: -0.725,0.65 -0.525,0.85 0.525,0.85 0.725,0.65 0.725,-0.65 0.525,-0.85 -0.525,-0.85 -0.725,-0.65
  silkscreen extent -0.38,-0.64 0.38,0.64, body extent -1.1,-0.67 1.1,0.68, height 0.69
SOD523F [mm] "SOD-523F; 2 Leads; Body 1.3 x 0.9 mm, (LxW)"
  round 0.508 on Mech15: 0(0,0)
  rrect20% 0.65x0.5 smd: A(0.9,0) K(-0.9,0)
  Top Copper pour cut-out: -0.725,-0.25 -0.725,0.25 -0.525,0.45 0.525,0.45 0.725,0.25 0.725,-0.25 0.525,-0.45 -0.525,-0.45
  silkscreen extent -0.25,-0.51 0.45,0.51, body extent -0.85,-0.45 0.85,0.45, height 0.7
SOP65P640X120-17N [mm]
  rect 1.475x0.45 smd: 1(-2.938,2.275) 2(-2.938,1.625) 3(-2.938,0.975) 4(-2.938,0.325) 5(-2.938,-0.325) 6(-2.938,-0.975) 7(-2.938,-1.625) 8(-2.938,-2.275) 9(2.938,-2.275) 10(2.938,-1.625) 11(2.938,-0.975) 12(2.938,-0.325) 13(2.938,0.325) 14(2.938,0.975) 15(2.938,1.625) 16(2.938,2.275)
  rect 2.41x3.29 smd: 17(0,0)
  silkscreen extent -3.67,2.85 -2.2,2.85, body extent -3.2,-2.5 3.2,2.5, height 1.2
SOT23-5 [mm] "SOT23, 5-Leads, Body 2.9x1.6mm, Pitch 0.95mm, Lead Span 2.8mm"
  rect 1.1x0.65 smd: 1(-1.2,0.95) 2(-1.2,0) 3(-1.2,-0.95) 4(1.2,-0.95) 5(1.2,0.95)
  silkscreen extent -1.33,-1.55 0.25,1.95, body extent -1.4,-1.45 1.4,1.45, height 1.14
SOT23-6_M [mm] "SOT23, 6-Leads, Body 2.9x1.6mm, Pitch 0.95mm, Lead Span 2.7mm, IPC Low Density"
  rect 1.3x0.7 smd: 1(-1.2,0.95) 2(-1.2,0) 3(-1.2,-0.95) 4(1.2,-0.95) 5(1.2,0) 6(1.2,0.95)
  silkscreen extent -1.32,-1.55 0.15,1.97, body extent -0.9,-1.55 0.9,1.55, height 1.45
SOT223 [mm] "SOT223 /SC-73"
  round 1 on Mech15: 0(0,0)
  rrect25% 1.75x1.1 smd: 1(-3.3,2.3) 2(-3.3,0) 3(-3.3,-2.3)
  rrect25% 1.75x3.5 smd: 4(3.3,0)
  silkscreen extent -1.85,-3.35 1.85,3.35, body extent -3.65,-3.35 3.65,3.35, height 1.8
SOT-23 [mm] "SOT-23; 3 Leads; Body 3.0 x 2.6 mm, inc. leads (LxW max)"
  rect 0.9x0.95 smd: 1(-0.95,-1.25) 2(0.95,-1.25)
  rect 0.6x0.95 smd: 3(0,1.25)
  silkscreen extent -2.07,-1.38 1.3,1.25
SPL_PL90 [mm] "Laser"
  rect 1.4x1.4 hole 0.9: A(-1.27,0)
  round 1.4 hole 0.9: K(1.27,0)
  silkscreen extent -2.55,-2.95 2.95,2.95, body extent -2.55,-2.96 2.95,2.96, height 8
"SX-6 QUARTZ" [mm] "Quartz_SX-6 (SMD06035C4)"
  rect 2.4x1.3 smd: 1(-2.2,-1.2) 2(2.2,-1.2) 3(2.2,1.2) 4(-2.2,1.2)
  Top Copper pour cut-out: -3.594,1.3 -3.594,1.994 -3.594,2.094 3.6,2.094 3.6,0.3 3.6,-2.1 3.1,-2.1 1.9,-2.1 -3.594,-2.1 -3.594,-2
  silkscreen extent -0.5,-1.5 0.5,1.75, body extent -3,-1.75 3,1.75, height 1.2
TDFN-8_0.65 [mm] "8- Lead Plastic DFN  (3mmx3mm)"
  rect 0.7x0.25 smd: 1(-1.4,0) 2(-1.397,-0.65) 3(-1.397,-1.3) 4(-1.397,-1.95) 5(1.403,-1.95) 6(1.403,-1.3) 7(1.403,-0.65) 8(1.4,0)
  rect 1.5x2.3 smd: 9(0,-1)
  silkscreen extent -2.16,-2.7 2.16,0.75, body extent -1.51,-2.5 1.51,0.5, height 0.8
"TE C-1909763" [mm]
  rect 1.05x2.2 smd: G(-1.475,0) G(1.475,0)
  rect 1x1.05 smd: S(0,-1.525)
  silkscreen extent -1.3,-1.3 1.3,1.3, body extent -1.5,-1.55 1.5,1.55, height 1.23
V0805HD [mm]
  rect 1.3x1.5 smd: 1(-0.95,0) 2(0.95,0)
  silkscreen extent 0,-0.6 0,0.6, body extent -1,-0.62 1,0.63, height 1.2

## Part data
C1 C2 C3 C4 C5 C6 C7 C8 C9 C10 C11 C12 C13 C14 C15 C16 C17 C18 C19 C20 C21 C22 C23 C24 C25 C26 C27 C28 C29 C30 C31 C32 C33 C34 C35 C36 C38: library part CC0805, "Chip capacitor"
C37: "Capacitor"
D1: library part "DIODE 2 pin"
D2 D7: library part "D Schottky", "Schottky Diode"
D3: "APD photodiode"
D4: library part "TO-18 Laser", "TO-18 Laser"
D6: "Silicon Switching Diode Array for High-Speed Switching"
DA1: library part MIC2288, "Step Up"
DA2: library part LD1117S, "LOW DROP FIXED AND ADJUSTABLE  POSITIVE VOLTAGE REGULATORS"
DA3: "Transimpedance Amplifier"
DA4 DA5: "Fast comparator"
DA6: "Single-Channel High-Speed Low-Side Gate Driver (with 4-A Peak Source and 8-A Peak Sink), DBV0006A"
DA7: "Integrated Circuit"
DD1: library part TDC_GP21, "TDC"
DD2: library part STM32F3_LQFP48, "Microcontroller"
J1 J2: library part "RF Connector - SMA", "U.FL Connector"
L1 L2 L4 L6 L7 L8 L9 L10 L11: "Ferrit Bead"
LED1: library part LED_0603, "LED_0603"
LH2: library part "M12 Lens Holder", "M12 Lens Holder"
LOGO1: library part Laser_Warning, "Laser Warning Symbol"
P1 P2: library part Power_pad, "Pad for wire"
P4 P5 P6 P7 P8 P9 P10 P11 P13 P14 P16: library part "Ext Pad", "Pad for wire"
P15: library part "Header 3", "Header, 3-Pin"
Q1: "N-Channel SIPMOS Small-Signal-Transistor, 240 V VDS, 0.11 A ID, -55 to 150 degC, PG-SOT23, Reel, Green"
Q2: "N-Channel OptiMOS 3 Power-Transistor, 40 V VDS, 31 A ID, -55 to 150 degC, PG-TSDSON-8-1, Reel, Green"
R1 R2 R3 R4 R5 R6 R7 R8 R9 R10 R11 R12 R13 R14 R15 R16 R17 R18 R19 R20 R21 R22 R23 R24 R25 R26 R27 R28 R29 R30 R31 R32 R33 R34 R35 R36 R37 R38 R39 R40 R41: library part RC0805, "Chip resistor"
X1: library part Quartz_32k, "Quartz"
X2: library part Quartz_SX-6, "Quartz_SX-6 (SMD06035C4)"

## Free pads (board coordinates)
  round 3.5 hole 3: 0(3,-45) 0(3,-3) 0(45,-44.5) 0(45,-3)

## Via types
v1: diameter 0.9, hole 0.5, Top Copper to Bottom Copper, 130 vias
v2: diameter 0.8, hole 0.4, Top Copper to Bottom Copper, 27 vias
v3: diameter 1, hole 0.5, Top Copper to Bottom Copper, 12 vias
v4: diameter 0.7/0.7/0.7/0.7 (per signal layer), hole 0.3, Top Copper to Bottom Copper, 9 vias

## Nets (pads, with @x,y where several pads share a name; then routed paths per layer and width w, separated by ;. In a path a pad name is that pad's centre, name@x,y a point inside that pad or via, vN(x,y) a via of type N, cw(c..) or ccw(c..) an arc to the next point about the centre after c; other vN are vias at no path point)
APD_V: C11.2 R1.2 R10.1 | length 5.5
  Bottom Copper w0.5: R1.2 15.9,-27.6 16.4,-27.1 C11.2 ; R10.1 C11.2@17.65,-27.15
COMP_DAC: DD2.14 L6.1 | length 43.8
  Top Copper w0.3: L6.1 7.55,-45.35 v1(8.2,-46) ; DD2.14 32.65,-35.25 33.2,-34.7 v1(34.6,-34.7)
  Signal Layer 2 w0.3: v1(8.2,-46) 8.6,-46.4 20.8,-46.4 22,-45.2 32.3,-45.2 33,-45.9 34.8,-45.9 34.8,-34.9 v1(34.6,-34.7)
COMP_N: C12.1 DA4.4 R13.1 R15.2 | length 8.1
  Top Copper w0.2: R13.1 2.4,-31.4 R15.2 ; DA4.4 3.6,-32.95 3.6,-31.8 R15.2 ; C12.1 4.1,-28.6 4.1,-31.3 R15.2
COMP_OUT: DA4.1 DD1.27 R17.2 R32.2 | length 10.2
  Top Copper w0.2: DA4.1 v2@7.15,-34.95 ; R17.2 7.4,-35.9 v2@7.4,-35.2 ; R32.2 10.5,-37.1 v2(10.9,-37.1) 11.35,-37.55 DD1.27
  Signal Layer 2 w0.2: v2(7.3,-35.1) 7.4,-35 8.8,-35 v2(10.9,-37.1)
  Bottom Copper w0.2: v2(7.3,-35.1) v2@7.4,-35.1
COMP_P: C13.1 DA4.3 R14.2 R15.1 | length 6.9
  Top Copper w0.2: C13.1 4.85,-29.65 4.85,-30.55 R15.1 ; DA4.3 6.1,-32.2 5.7,-31.8 R15.1 ; R14.2 7.9,-31.8 7.4,-31.3 5.8,-31.3 R15.1
DCDC_HV: C10.2 D1.K R8.2 R10.2 | length 26.2
  Signal Layer 2 w0.5: v3(13.1,-13.6) 13.2,-13.5 16.5,-13.5 19.1,-16.1 19.1,-28.1 v1@20,-29
  Bottom Copper w0.5: D1.K@11.3,-9.5 13,-11.2 13.017,-11.599 v3(13.1,-13.6) C10.2@12.1,-13.6
  other v1: 19.9,-28.9
ENC: DD2.10 P6.1 R34.2 | length 16.9
  Top Copper w0.3: DD2.10 40.157,-38.65 40.757,-38.05 45.85,-38.05 46.2,-38.4 P6.1
  Bottom Copper w0.3: R34.2 43,-38.4 P6.1
FB_VOLT: C8.1 DD2.20 R8.1 R9.1 | length 42.1
  Top Copper w0.3: DD2.20 29.65,-34.75 v1(30.1,-34.3)
  Signal Layer 2 w0.3: v3(10.1,-11.6) 10.2,-11.5 16,-11.5 21,-16.5 21,-25.6 23.7,-28.3 24.3,-28.3 25.8,-29.8 v1(25.8,-30)
  Bottom Copper w0.3: v1(25.8,-30) 26.7,-30 27.1,-30.4 27.1,-33.5 27.9,-34.3 v1(30.1,-34.3)
  Bottom Copper w0.5: C8.1 R9.1 v3(10.1,-11.6) R8.1@10.9,-11.6
GATE: DA6.2 DA6.3 Q2.4 | length 8.6
  Top Copper w0.5: v1(40.3,-24.2) 40.3,-23.825 v1@40.35,-23.775 ; DA6.2@42,-18.9 42,-19.9 v1(42.5,-20.4) 42.95,-19.95 DA6.3@42.95,-18.9
  Bottom Copper w0.5: v1(40.3,-24.2) 42.5,-22 v1(42.5,-20.4)
GATE_PWM: Q1.1 R2.2 R3.1 | length 6.1
  Bottom Copper w0.3: R3.1@9.65,-2.25 Q1.1 9.65,-4.65 9.8,-4.8 12.2,-4.8 12.5,-5.1 R2.2
GND: C1.1 C3.1 C4.1 C5.1 C6.2 C7.1 C8.2 C10.1 C11.1 C14.2 C15.2 C18.1 C20.1 C21.1 C22.1 C25.2 C26.1 C27.1 C28.2 C29.1 C30.1 C31.1 C32.1 C33.1 D6.1 DA2.1 DA3.5 DA3.8 DA3.9 DA4.2 DD1.4 DD1.21 DD1.28 DD1.31 DD1.33 DD2.8 DD2.23 DD2.35 DD2.44 DD2.47 J1.G LED1.2 P2.1 P9.1 P14.1 Q1.2 R3.2 R9.2 R14.1 R17.1 R29.1 W1.2 W2.2 W4.1 W5.1 | length 81
  Top Copper w0.2: DD1.31 DD1.33@13.65,-39.55 ; DD1.28 14.75,-38.05 DD1.21 ; DD1.4 DD1.33@14.75,-38.55
  Top Copper w0.3: C15.2 4.85,-35.95 4.85,-34.05 4.9,-34 DA4.2 v2(7.9,-34) ; C29.1 23.35,-37.45 23.35,-36.85 v1(23.9,-36.3) ; C31.1@24.6,-44.45 24.8,-44.25 24.8,-43.207 25.357,-42.65 DD2.35 28.35,-42.65 ; 28.15,-38.35 DD2.23 C32.1@28.15,-34.55 ; DD2.44 31.15,-42.55 ; 32.25,-39.65 DD2.8 35.407,-39.65 36.078,-39.65 v2@37.6,-39.65 ; C30.1@32.65,-45.8 DD2.47 32.65,-42.55
  Top Copper w0.5: C14.2 3.1,-37.9 v1(3.1,-38.4) ; 5.3,-3 10,-3
  Top Copper w0.75: 7.6,-5.3 7.6,-1.5 ; 13.4,-5.4 13.9,-5.9 15,-5.9 ; 15,-7.9 15,-4.2 ; C3.1 29.9,-12.3 DA2.1 31.7,-12.5 33.4,-10.8 W1.2
  Bottom Copper w0.3: Q1.2 R3.2@11.55,-2.35
  Bottom Copper w0.5: v3(5.2,-9.7) 5.5,-10 C8.2 R9.2 7.7,-11.9 9.2,-13.4 v3(9.6,-13.4) ; C33.1 9.8,-22.7 9.8,-20.8 10.8,-19.8 DA3.9 ; Q1.2 12.4,-3.75 12.55,-3.9 12.6,-3.85 v1(12.6,-3.7) ; DA3.9@12.3,-19.6 C4.1
  Bottom Copper w0.75: 30.1,-28.235 30.1,-25.735
  other v1: 24.6,-43.6 11.7,-43.3 44.2,-41.5 8,-40.7 30.4,-40.3 13.8,-39.4 16.2,-39.4 29.1,-38.9 31.7,-38.9 13.8,-37.1 16.2,-37 42.8,-35.5 11,-34 9,-30.5 11,-30.5 13,-30.5 15,-30.5 17,-30.5 20.5,-30.5 2,-30 2,-28 2,-26 2,-22 23.5,-21.1 14.6,-19.2 18,-18 25.4,-16.8 29.3,-16.1 25.4,-15.1 16.4,-15 23,-15 1.5,-14.6 3,-14.6 4.9,-14.6 6.4,-14.6 8,-14.6 14.5,-14.5 29.9,-12.9 1.5,-12.5 29.9,-11.8 1.5,-11 1.5,-9.5 1.5,-8 1.5,-6.5 3,-5.5 6.7,-3.9 8.3,-3.8 7.5,-3.1
  other v2: 27.3,-46.2 19.1,-42.1 37.85,-39.9 7.3,-37.7
  other v3: 7.4,-11.6 7.1,-10
  other v4: 11.7,-20.1 12.7,-20.1 11.2,-19.5 12.2,-19.5
HCURRENT: C17.2 Q2.5 Q2.6 Q2.7 Q2.8 R18.1 | length 8
  Top Copper w0.3: Q2.5@43.775,-23.6 v4@44.4,-23.6 ; Q2.6@43.775,-22.95 44.4,-22.95 ; Q2.7@43.775,-22.3 44.1,-22.3 ; Q2.8@43.775,-21.65 44.25,-21.65 44.4,-21.8
  Top Copper w0.75: v4(44.4,-23.4) 44.4,-22.95 44.4,-22
  Top Copper w0.8: Q2.8@42.3,-23.3 43,-24 C17.2
  Bottom Copper w0.75: R18.1 44.4,-21.85 v4(44.4,-23.4)
I_LASER: D4.K D7.A DA5.3 R19.2 R20.2 | length 9.4
  Top Copper w0.3: D7.A 38.33,-24.9 D4.K@38.8,-25.37 ; DA5.3@37.5,-27.4 DA5.3 37.8,-27.6 40.4,-27.6 ; R19.2 40.4,-26.4 40.4,-27.6 ; R20.2 40.4,-28.25 40.4,-27.6
  Top Copper w1: D4.K D4.K@38.8,-25.37 ; D4.K@38.83,-25.4 D4.K@38.8,-25.37 ; R19.2@39.5,-26.4 38.8,-25.5 D4.K@38.8,-25.37
LAS_POWER: D4.A D7.K Q2.1 Q2.2 Q2.3 | length 4.7
  Top Copper w0.3: D7.K 38.53,-23.1 38.8,-22.83 D4.A D4.A@38.8,-22.6 ; Q2.3 39.925,-22.925 39.825,-22.825 39.825,-22.25 ; Q2.2 39.85,-22.275 39.825,-22.25 ; Q2.1 39.825,-21.625 39.825,-22.25
LAS_TR: C23.2 DA5.4 R22.2 R23.1 | length 8.3
  Top Copper w0.3: R22.2 32.8,-22.3 34.4,-22.3 35.2,-23.1 R23.1 C23.2 DA5.4
LASER_COMP: DD1.30 R27.2 | length 29.3
  Top Copper w0.2: v2(10.9,-39.7) 11.55,-39.05 DD1.30 ; v1@23.7,-30.9 31.4,-30.9 R27.2
  Signal Layer 2 w0.2: v2(10.9,-39.7) 11.7,-38.9 11.7,-35.8 15.1,-32.4 22.2,-32.4 v1@23.7,-30.9
  other v1: 23.8,-30.9
LASER_COMP_O: DA5.1 R26.2 R27.1 | length 8
  Top Copper w0.3: R27.1 35,-31 38.45,-31 R26.2 38.45,-29.3 DA5.1
LASER_DAC: DD2.15 R4.1 | length 31.3
  Top Copper w0.3: DD2.15 32.15,-34.95 33,-34.1 v1(33,-33.6) ; v1(35.8,-17.9) 35.8,-10.313 R4.1@36.413,-9.7
  Signal Layer 2 w0.3: v1(33,-33.6) 30.1,-30.7 30.1,-29.662 29.9,-29.462 29.9,-23.3 35.3,-17.9 v1(35.8,-17.9)
LASER_PULSE: DA6.6 DD1.5 R16.2 | length 54
  Top Copper w0.2: v2(15.25,-42.05) DD1.5 ; v1@24,-32.5 24,-32.2 24.4,-31.8 29.6,-31.8 v1(29.8,-32)
  Top Copper w0.3: DA6.6 41.05,-16.4 41.3,-16.15 41.3,-16.105 41.505,-15.9 41.55,-15.9 v1(42.6,-14.85)
  Signal Layer 2 w0.2: v2(15.25,-42.05) 15.25,-35.35 17.6,-33 23.5,-33 v1@24,-32.5
  Signal Layer 2 w0.3: v1(29.8,-32) 29.4,-32 29.6,-32.2 29.6,-29.869 29.2,-29.469 29.2,-22.8 35.9,-16.1 41.35,-16.1 v1(42.6,-14.85)
  other v1: 23.8,-32.5
LED: DD2.13 R33.2 | length 8.9
  Top Copper w0.3: DD2.13 DD2.13@33.15,-35.457 ; DD2.13@33.154,-35.454 33.304,-35.304 33.904,-35.304 34,-35.4 v1(34,-35.9)
  Bottom Copper w0.3: R33.2 32.6,-37.4 34.1,-35.9 v1(34,-35.9)
LGND: C2.1 C9.1 C16.1 C17.1 C19.1 C23.1 C24.1 DA1.2 DA5.2 DA6.4 DA6.5 R6.1 R16.1 R19.1 R23.2 R26.1 W1.1 W2.1 W3.1 | length 49.9
  Top Copper w0.3: R19.1 40.9,-26.4 40.9,-27.4 41.4,-27.9 W3.1@42.7,-27.9
  Top Copper w0.5: v3(33.5,-28.35) v3(33.5,-26.6) C23.1 v3(33.5,-23.4) ; C24.1@33.75,-28.35 DA5.2 R26.1@39.2,-28.35 ; C16.1@39.7,-18 41.9,-18 ; C2.1@41.25,-4.35 41.25,-6.75 DA1.2 43.85,-6.75 45.8,-8.7 45.8,-11.4 C9.1 ; DA6.5 42,-17.9 41.9,-18 ; DA6.4 42.95,-18.05 41.95,-18.05 41.9,-18
  Top Copper w0.75: 34.6,-9.1 v1(34.6,-8) ; 34.6,-6.9 v1(34.6,-8) ; v1(36.6,-8) v1(35.6,-8) v1(34.6,-8) ; R19.1@41.9,-26.6 C17.1@42.95,-26.6 ; C17.1 43.65,-26.65 45.5,-24.8 45.5,-18.9 44.5,-17.9 43.2,-17.9
  Bottom Copper w0.75: 31.5,-28.2 31.5,-25.9
  other v1: 45,-25.3 46.1,-23.8 46.2,-21.6 37.6,-21.1 33.9,-20.8 35.8,-20.8 46.2,-19.7 46.2,-17.7 43.1,-16.3 41.1,-11.5 46,-11.2 34.9,-11.1 36.7,-11.1 41.4,-4.1
  other v3: 39.3,-28.45 43.3,-26.6
M_COM: DA7.13 R39.2 R40.2 R41.2 | length 8.9
  Top Copper w0.3: v1(20.2,-7.6) 22.087,-7.6 DA7.13
  Bottom Copper w0.4: v1(20.2,-7.6) 21.45,-6.35 R39.2 R40.2 R41.2
M_PWM: DA7.16 DD2.21 P16.1 R35.1 | length 32.3
  Top Copper w0.3: v1(22.2,-10.2) DA7.16@22.2,-9.513 ; v1(25.9,-32.8) 28.1,-32.8 29.15,-33.85 DD2.21
  Signal Layer 2 w0.3: v1(22.2,-10.2) 22.2,-10.1 24,-11.9 24,-19 26.9,-21.9 26.9,-32.2 26.3,-32.8 v1(25.9,-32.8)
M_U: DA7.10 P15.1 R39.1 | length 7.3
  Top Copper w0.4: 20.7,-5.151 21.124,-5.575 DA7.10
  Top Copper w0.6: 20.7,-5.151 20.7,-3.8 21.6,-2.9 P15.1
  Bottom Copper w0.4: P15.1 23.4,-3.84 R39.1
M_V: DA7.9 P15.2 R40.1 | length 5.3
  Top Copper w0.4: DA7.9 23.275,-4.925 23.4,-4.8
  Top Copper w0.6: 23.4,-4.8 P15.2@25,-3.2
  Bottom Copper w0.4: R40.1 R40.1@25,-4.25
  Bottom Copper w0.5: R40.1@25,-4.25 P15.2
M_W: DA7.7 P15.3 R41.1 | length 6.7
  Top Copper w0.4: DA7.7 28.925,-5.575 29.4,-5.1
  Top Copper w0.5: 29.4,-5.1 29.4,-4.3
  Top Copper w0.6: P15.3@27.8,-2.9 28.1,-2.9 29.4,-4.2 29.4,-4.3
  Bottom Copper w0.4: R41.1 26.6,-3.84 P15.3
MCU_GATE_PWM: DD2.17 R2.1 | length 40.9
  Top Copper w0.3: DD2.17 31.15,-34.45 v1(31.4,-34.2)
  Signal Layer 2 w0.3: v1(13.2,-6.8) 13.2,-9.2 14.5,-10.5 16.5,-10.5 21.8,-15.8 21.8,-25.5 23.9,-27.6 v1(25.6,-27.6)
  Bottom Copper w0.3: v1(25.6,-27.6) 26.4,-27.6 27.8,-29 27.8,-32.5 28.4,-33.1 30.3,-33.1 v1(31.4,-34.2)
MGND: C36.1 C37.2 C38.2 DA7.8 DA7.15 DA7.17 R35.2 R37.2 R38.2 W4.2 W5.2 | length 31.2
  Top Copper w0.4: C37.2 18.15,-9.65 ; C36.1 19.65,-10.6 R37.2 ; DA7.15 23.575,-8.825 25.1,-7.3 DA7.17 DA7.17@25.1,-6.3 ; R35.2 23.9,-9 DA7.17@25.1,-7.8
  Top Copper w0.45: 26.475,-4.925 DA7.8
  Top Copper w0.5: DA7.17@25.1,-6.3 26.475,-4.925
  Top Copper w0.75: C37.2 16.2,-7.7 W5.2 16.2,-6 16.5,-6 C38.2
  Signal Layer 1 w0.5: 16.7,-8.993 16.827,-9.12 ; 23.2,-7.5 v1(24.5,-7.5) v1(25.7,-7.5) 27.2,-7.5
  Signal Layer 1 w0.8: 16.7,-8.993 v1@16.7,-7 ; C37.2 18.3,-8.2
  Bottom Copper w0.3: v1(25.1,-8.4) 26.8,-10.1 R38.2
  other v1: 18.7,-10.1 16.7,-6.7
NetC2_2: C2.2 DA1.4 DA1.5 L2.1 L3.1 | length 7.3
  Top Copper w0.5: L2.1@38.2,-7.7 39.2,-7.7 ; C2.2 39.2,-4.5 39.2,-7.7 ; DA1.5 39.2,-7.7 ; L3.1 DA1.5@40.25,-7.95
NetC5_2: C5.2 DA3.3 | length 2.5
  Top Copper w0.3: C5.2@10.6,-23.1 10.8,-22.9 v4(10.8,-22.2)
  Bottom Copper w0.2: v4(10.8,-22.2) 10.9,-22.3 11.6,-21.6 DA3.3
NetC6_1: C6.1 L4.2 L5.1 | length 4
  Bottom Copper w0.6: L4.2@3.1,-7.9 L5.1
NetC14_1: C14.1 R12.1 R13.2 | length 7.6
  Top Copper w0.5: R13.2 v1(2,-35) C14.1
  Signal Layer 2 w0.5: v1(2,-41) v1(2,-35)
NetC15_1: C15.1 DA4.5 L7.2 | length 4.6
  Top Copper w0.5: DA4.5 4,-35.25 C15.1@4,-36.85 ; L7.2 C15.1
NetC16_2: C16.2 DA6.1 L8.2 | length 3.4
  Top Copper w0.75: L8.2 C16.2@39.25,-19.85 ; C16.2@39.3,-19.8 40.3,-19.8 DA6.1@40.8,-19.3
NetC19_2: C19.2 L10.2 R22.1 | length 3.3
  Top Copper w0.5: C19.2@31.7,-26.6 31.9,-26.4 R22.1 ; L10.2 C19.2@31.9,-26.8
NetC20_2: C20.2 DD1.3 DD1.22 R21.2 | length 13
  Top Copper w0.2: v2(14.1,-42) 14.25,-41.85 DD1.3 ; DD1.22 v2(14.25,-34.55)
  Signal Layer 2 w0.2: v2(14.1,-42) 14.6,-41.5 14.6,-34.9 v2(14.25,-34.55)
  Bottom Copper w0.3: C20.2@14.1,-43.25 v2(14.1,-42) ; C20.2@14.15,-43.3 R21.2
NetC21_2: C21.2 DD1.15 R24.2 X1.1 | length 9
  Top Copper w0.2: DD1.15 18.25,-37.05 19.6,-35.7 22.2,-35.7 X1.1
  Top Copper w0.3: R24.2 22.3,-34.4 X1.1
  Bottom Copper w0.3: C21.2 22.3,-34.4 X1.1
NetC22_2: C22.2 DD1.16 R24.1 X1.2 | length 5.8
  Top Copper w0.2: DD1.16 18.05,-36.55 X1.2@19.6,-35
  Top Copper w0.3: X1.2 20.6,-34.3 R24.1
  Bottom Copper w0.3: X1.2 20.2,-35 20.6,-34.6 C22.2
NetC25_1: C25.1 DD2.6 X2.1 | length 5.9
  Top Copper w0.3: DD2.6@34.85,-40.65 35.7,-40.65 35.789,-40.65 37.15,-42.011 37.2,-42.061 37.2,-42.392 37.639,-42.831 38.469,-42.831 v2(39.3,-42)
NetC28_1: C28.1 DD2.5 X2.3 | length 8.3
  Top Copper w0.3: DD2.5@34.85,-41.15 35.543,-41.15 36.7,-42.307 36.7,-42.599 37.432,-43.331 40.531,-43.331 41.3,-44.1 v1(41.3,-44.6)
NetC29_2: C29.2 DD1.13 R31.2 | length 5.7
  Top Copper w0.2: DD1.13 C29.2@20.8,-38.05
  Top Copper w0.3: C29.2 21,-38.3 R31.2
NetC33_2: C33.2 D3.C R1.1 | length 4.3
  Bottom Copper w0.5: C33.2 C33.2@10.8,-25.1 ; C33.2@10.7,-25.2 D3.C@12.3,-25.2 ; R1.1@12.4,-27.6 D3.C@12.4,-25.3
NetC34_1: C34.1 DA7.5 | length 2.4
  Top Copper w0.3: DA7.5 29.375,-6.875 29.75,-7.25 C34.1@30.3,-7.25
NetC34_2: C34.2 DA7.6 | length 2.5
  Top Copper w0.3: DA7.6 29.275,-6.225 29.9,-5.6 C34.2@30.3,-5.6
NetC35_2: C35.2 DA7.4 | length 2.8
  Top Copper w0.3: DA7.4 29.025,-7.525 C35.2@30.275,-8.775
NetC36_2: C36.2 DA7.12 | length 4.5
  Top Copper w0.3: C36.2 18.7,-7.3 19.4,-6.6 20.222,-6.6 20.372,-6.75 20.55,-6.75 20.675,-6.875 DA7.12
NetC37_1: C37.1 C38.1 DA7.11 L11.2 | length 8.2
  Top Copper w0.4: L11.2 19.7,-5.3 20.6,-6.2 22.137,-6.2 DA7.11
  Top Copper w0.5: C37.1 19.55,-3.2 L11.2
NetD1_A: D1.A L5.2 Q1.3 | length 2.8
  Bottom Copper w0.5: L5.2@10.05,-7.6 10.6,-7.6 ; Q1.3 10.6,-7.6 ; D1.A 10.6,-7.6
NetD2_A: D2.A DA1.1 L3.2 | length 3.7
  Top Copper w0.5: L3.2 42.4,-9.45 DA1.1 ; 42.425,-8.6 D2.A
NetD3_A: D3.A D6.3 DA3.2 | length 2
  Bottom Copper w0.2: 11.9,-22.8 v4(12.3,-22.8) ; D3.A@12.25,-22.75 DA3.2
NetDA1_3: DA1.3 R4.2 R5.1 R6.2 | length 18.5
  Top Copper w0.5: DA1.3 44.4,-5.8 45.3,-6.7 v1(45.9,-6.7)
  Signal Layer 2 w0.5: v1(38.7,-9.7) 46,-9.7 ; v3(45.9,-13.2) 46.9,-12.2 46.9,-10.6 46,-9.7 ; v1(45.9,-6.7) 46,-6.8 46,-9.7
NetDA7_1: DA7.1 R38.1 | length 1.9
  Top Copper w0.3: DA7.1 29.075,-9.475 29.6,-10 v1(29.6,-10.1)
NetDA7_14: DA7.14 R37.1 | length 2.2
  Top Copper w0.3: R37.1 21.025,-8.175 DA7.14
NetDD1_8: DD1.8 DD2.31 | length 11
  Top Copper w0.2: DD1.8 16.75,-41.722 18.378,-41.722 18.8,-41.3 24.666,-41.3 25.316,-40.65 DD2.31
NetDD1_9: DD1.9 DD2.30 | length 10
  Top Copper w0.2: DD1.9 17.95,-40.05 18.8,-40.9 24.5,-40.9 25.25,-40.15 DD2.30 DD2.30@26.75,-40.15
NetDD1_10: DD1.10 DD2.26 | length 11.6
  Top Copper w0.2: DD1.10 18.15,-39.55 18.8,-40.2 v2(23.4,-40.2) ; v2(24.1,-37.6) 24.65,-38.15 DD2.26
  Signal Layer 2 w0.2: v2(23.4,-40.2) 23.4,-38.3 v2(24.1,-37.6)
NetDD1_11: DD1.11 DD2.28 | length 9.3
  Top Copper w0.2: DD1.11 18.35,-39.05 18.8,-39.5 23.5,-39.5 23.9,-39.1 26.3,-39.1 DD2.28
NetDD1_12: DD1.12 DD2.27 | length 9.3
  Top Copper w0.2: DD1.12 18.65,-38.55 19.2,-39.1 23.3,-39.1 23.75,-38.65 DD2.27
NetDD2_11: DD2.11 P7.1 | length 11.8
  Top Copper w0.3: DD2.11 39.95,-38.15 40.6,-37.5 44.7,-37.5 v1(45.6,-36.6)
NetDD2_12: DD2.12 P8.1 | length 12.1
  Top Copper w0.3: DD2.12@34.85,-37.65 36.15,-37.65 v1(36.5,-37.3)
  Signal Layer 2 w0.3: v1(36.5,-37.3) 43,-37.3 v1(45.7,-34.6)
NetDD2_33: DD2.33 R32.1 | length 21.6
  Top Copper w0.2: v2(9.5,-40.3) R32.1@9.5,-39.6 ; v1(23.8,-42.1) 24.2,-41.7 26.35,-41.7 DD2.33
  Signal Layer 2 w0.2: v2(9.5,-40.3) 9.5,-42.5 11.3,-44.3 20.274,-44.3 20.524,-44.05 21.85,-44.05 v1(23.8,-42.1)
NetJ1_S: J1.S R7.1 | length 2.1
  Top Copper w0.2: J1.S 5.575,-18.425 R7.1@6.625,-17.375
NetJ2_G: J2.G W3.2 | length 8.3
  Top Copper w0.2: J2.G@44.4,-32.1 46.6,-32.1 46.8,-31.9 46.8,-29.4 46.6,-29.2 J2.G@45.4,-29.2
  Top Copper w0.5: 43.9,-27.9 45.15,-29.15 J2.G@45.2,-29.15
NetJ2_S: J2.S R20.1 | length 2.6
  Top Copper w0.3: R20.1@41.125,-30.625 J2.S
NetL6_2: L6.2 R12.2 | length 4.2
  Top Copper w0.5: R12.2 4.2,-41 L6.2@6.825,-43.625
NetL9_1: L9.1 R21.1 R30.1 | length 4.2
  Bottom Copper w0.3: R30.1 17.15,-41.2 R21.1 L9.1@18.45,-43.3
NetLED1_1: LED1.1 R33.1 | length 1.3
  Bottom Copper w0.5: LED1.1 R33.1
NetP13_1: P13.1 R36.2 | length 2
  Bottom Copper w0.3: R36.2@42.8,-40.3 43.5,-40.3 P13.1@44.4,-39.4
NRST: C26.2 DD2.7 R25.2 | length 10.2
  Top Copper w0.3: DD2.7@34.85,-40.15 35.614,-40.15 36.457,-40.15 38.007,-41.7 37.95,-41.757 v2(37.95,-42.081)
  Signal Layer 2 w0.3: v1@37.65,-46.45 v1(37.7,-46.5) 37.7,-42.331 v2(37.95,-42.081)
  Bottom Copper w0.3: v1(37.7,-46.5) C26.2@39.1,-46.5
NTC: DD2.25 R28.2 R29.2 | length 23.3
  Top Copper w0.3: v1(17.6,-22.6) 19.9,-22.6 v1(20.1,-22.8) ; v1(23.8,-29.3) 24.3,-28.8 R28.2 ; v1(25,-35.5) 25,-37.4 25.25,-37.65 DD2.25
  Signal Layer 2 w0.3: v1(20.1,-22.8) 20.1,-25.6 v1(23.8,-29.3) ; 24.3,-29.3 25,-30 v1(25,-35.5)
OUT_N: C12.2 DA3.7 R11.2 | length 16.3
  Signal Layer 2 w0.2: v2(7.4,-27.7) 7.625,-27.475 7.625,-19.118 9.993,-16.75 11.84,-16.75 12.315,-17.225 v4(12.675,-17.225)
  Bottom Copper w0.2: DA3.7 12.25,-17.65 v4(12.675,-17.225)
OUT_P: C13.2 DA3.6 R7.2 R11.1 | length 19
  Top Copper w0.2: R7.2 11.45,-17.35 v4(11.55,-17.45)
  Signal Layer 2 w0.2: v2(7.5,-29.4) 7.5,-28.85 8.225,-28.125 8.225,-19.225 10,-17.45 v4(11.55,-17.45)
  Bottom Copper w0.2: v4@11.5,-17.4 v4(11.55,-17.45) 11.6,-17.5 DA3.6
RX: DD2.40 P11.1 | length 3.4
  Top Copper w0.3: DD2.40 29.15,-45.407 29.943,-46.2 v1(31.3,-46.2)
SWCLK: DD2.37 P5.1 | length 4
  Top Copper w0.3: v2@24.95,-46.2 25.7,-45.45 27.65,-45.45 DD2.37
  other v2: 24.8,-46.2
SWDIO: DD2.34 P4.1 | length 6.6
  Top Copper w0.3: v2(22.2,-46.2) 22.2,-44.869 24.919,-42.15 DD2.34
TDC_CLK: DD1.1 DD2.29 | length 17.7
  Top Copper w0.2: v2(12.4,-42) 12.5,-42 13.25,-41.25 DD1.1 ; v2(24.45,-39.889) 24.461,-39.9 24.5,-39.9 24.75,-39.65 DD2.29
  Signal Layer 2 w0.2: v2(12.4,-42) 13.4,-43 21.8,-43 24.45,-40.35 v2(24.45,-39.889)
TDC_VCC: C18.2 DD1.14 DD1.25 DD1.26 DD1.29 R30.2 R31.1 | length 22.9
  Top Copper w0.2: v2(10.9,-38.3) 11.15,-38.55 DD1.29 ; v2(10.9,-35.8) 10.9,-36.1 11.35,-36.55 ; DD1.26 11.85,-37.05 11.35,-36.55 ; DD1.25 11.35,-36.55 ; DD1.14 18.95,-37.55 v1(19.5,-37)
  Top Copper w0.3: v1(19.5,-37) 19.7,-36.8 R31.1
  Bottom Copper w0.2: v2(10.9,-35.8) 11.8,-36.7 11.8,-38.6 ; v1@19.5,-37.1 v1(19.5,-37)
  Bottom Copper w0.3: v2(10.9,-38.3) 11.2,-38.6 18,-38.6 v1@19.5,-37.1 ; C18.2 v1(19.5,-37)
TX: DD2.39 P10.1 | length 2.1
  Top Copper w0.3: v2@28.65,-45.85 DD2.39
  Bottom Copper w0.3: v2(28.7,-46.2) P10.1@29.4,-46.2
VCC: C7.2 C24.2 C27.2 C30.2 C31.2 C32.2 DA2.2 DA2.4 DA5.5 DD2.1 DD2.9 DD2.24 DD2.36 DD2.48 L1.1 L7.1 L9.2 L10.1 R25.1 R28.1 R34.1 R36.1 | length 118.5
  Top Copper w0.3: C32.2 26.2,-35 26.5,-35.3 27.65,-35.3 DD2.24 ; v2(26.25,-43.9) DD2.36@26.25,-43.25 ; R28.1 28.6,-29.3 v1(28.6,-30) 28.5,-30 v1@28.45,-30.05 ; DD2.48@33.2,-45.2 33.8,-45.2 ; C24.2@33.625,-30.175 34.5,-29.3 DA5.5 ; v1(33.8,-44.6) 33.8,-45.2 ; DD2.1 35.85,-43.15 35.85,-45.45 35.2,-46.1 C30.2 34.65,-45.2 33.8,-45.2 ; DD2.9 40.75,-39.15 v2(41.1,-38.8)
  Top Copper w0.4: L1.1 19.05,-19.9 24.7,-19.9 25,-19.6 C7.2@25,-18.8
  Top Copper w0.5: v1@28.45,-30.05 L10.1 C24.2
  Top Copper w0.6: C7.2@25,-18.8 25.8,-18.8
  Top Copper w1: DA2.4 DA2.2
  Signal Layer 2 w0.4: v1(35.9,-43.9) 35.9,-43 40,-38.9 41,-38.9 v2(41.1,-38.8)
  Signal Layer 2 w0.5: v1(6.3,-39.5) 6.4,-39.6 6.4,-40.7 10.8,-45.1 v1(19.1,-45.1) 20.251,-45.1 20.751,-44.6 25.8,-44.6 26.25,-44.15 v2(26.25,-43.9) 33.1,-43.9 v1(33.8,-44.6) ; v1@26.05,-34.35 v1@26.25,-34.55
  Signal Layer 2 w0.75: v2(26.25,-43.9) v1@26.25,-34.55
  Signal Layer 2 w1: v1@26.05,-34.35 28,-32.4 28,-19.1 v1(27.6,-19.5) ; v1(26.5,-18.8) 27.6,-18.8 ; 27.65,-18.8 v1(28.7,-18.8)
  Bottom Copper w0.3: C27.2@39.7,-40.4 39.7,-39.7 40.6,-38.8 R34.1@41,-38.8
  Bottom Copper w0.4: v1(33.8,-44.6) 34.5,-43.9 37,-43.9 R25.1@37.6,-44.5 ; R36.1@40.8,-40 40.8,-39.1 v2(41.1,-38.8)
  other v1: 26,-34.3 27.6,-12.2
VCC_TIA: C1.2 C4.2 D6.2 DA3.1 L1.2 | length 4.6
  Top Copper w0.3: D6.2 C1.2
  Top Copper w0.5: C1.2@14.7,-20.7 L1.2@16.5,-20.7
  Bottom Copper w0.3: DA3.1@13,-21.2 C4.2@14.6,-21.2
  other v1: 14.5,-21.3
VIN: C3.2 C35.1 DA2.3 L2.2 L4.1 L11.1 P1.1 | length 90.7
  Top Copper w0.75: L11.1@19.7,-1.05 34.45,-1.05 P1.1@34.45,-2.8 ; DA2.3 25.3,-11.7 26.3,-10.7 C3.2 ; v1(32.1,-2.8) P1.1@34.45,-2.8 ; P1.1@34.8,-3.3 34.45,-2.95 P1.1@34.45,-2.8 ; P1.1@35.15,-2.95 L2.2@38,-5.8
  Signal Layer 2 w0.75: v1(3.1,-11.2) 3.1,-7.4 5.6,-4.9 5.6,-2.5 6.9,-1.2 30.1,-1.2 30.9,-2 30.9,-2.8 ; v1(25.3,-12.9) 25.3,-13.2 26.7,-14.6 32,-14.6 32,-5.4 30.9,-4.3 30.9,-2.8 ; v1(32.1,-2.8) 34.8,-2.8 31.2,-2.8 30.9,-2.8
  Bottom Copper w0.75: v1(3.1,-11.2) L4.1
  other v1: 25.3,-11.8 31.7,-8.8 33.275,-2.8 34.7,-2.8
VLASER: C9.2 D2.K L8.1 R5.2 R18.2 | length 19.7
  Top Copper w0.5: D2.K 44.4,-10.8
  Top Copper w0.75: L8.1 v1(37.6,-18.1) ; 44.4,-10.8 44.4,-15.8 45,-16.4 v1(45.6,-16.4)
  Signal Layer 2 w0.75: v1(37.6,-18.1) 42.75,-18.1 44.45,-16.4 v1(45.6,-16.4)
  Bottom Copper w0.75: R18.2 43.8,-18.2 v1(45.6,-16.4)
pads on no net: C1.0 C2.0 C3.0 C4.0 C5.0 C6.0 C7.0 C8.0 C9.0 C10.0 C11.0 C12.0 C13.0 C14.0 C15.0 C16.0 C17.0 C18.0 C19.0 C20.0 C21.0 C22.0 C23.0 C24.0 C25.0 C26.0 C27.0 C28.0 C29.0 C30.0 C31.0 C32.0 C33.0 C34.0 C35.0 C36.0 C38.0 D1.0 D2.0 D3.NC D7.0 DA2.0 DA3.4 DA7.2 DA7.3 DD1.2 DD1.6 DD1.7 DD1.17 DD1.18 DD1.19 DD1.20 DD1.23 DD1.24 DD1.32 DD2.0 DD2.2 DD2.3 DD2.4 DD2.16 DD2.18 DD2.19 DD2.22 DD2.32 DD2.38 DD2.41 DD2.42 DD2.43 DD2.45 DD2.46 L1.0 L2.0 L4.0 L6.0 L7.0 L8.0 L9.0 L10.0 L11.0 LED1.0 LH1.M2 LH2.M2 R1.0 R2.0 R3.0 R4.0 R5.0 R6.0 R7.0 R8.0 R9.0 R10.0 R11.0 R12.0 R13.0 R14.0 R15.0 R16.0 R17.0 R18.0 R19.0 R20.0 R21.0 R22.0 R23.0 R24.0 R25.0 R26.0 R27.0 R28.0 R29.0 R30.0 R31.0 R32.0 R33.0 R34.0 R35.0 R36.0 R37.0 R38.0 R39.0 R40.0 R41.0 X2.2 X2.4

## Polygon pours and split planes (outlines as drawn)
MGND on Signal Layer 1 "motor_gnd" (solid, remove dead copper, pour order 14): 15.7,-1.699 15.7,-8.7 17.891,-10.8 30.5,-10.8 30.5,-2 30.9,-1.6
GND on Signal Layer 1 "Main_GND_int" (solid, remove dead copper, pour order 8): 1,-1.6 15.4,-1.6 15.4,-9 17.6,-11.2 30.5,-11.2 30.5,-33.6 45.4,-33.6 46.5,-34.7 47,-35.2 47,-47.6 1,-47.6
LGND on Signal Layer 1 "Laser_GND_int" (solid, remove dead copper, pour order 2): 38.7,-3 42,-3 43.4,-5.1 45.8,-5.1 46.7,-6 46.7,-27.5 46.7,-32.488 30.997,-32.489 30.997,-20 34,-16.997 34,-8 34,-6.6
GND on Top Copper "Main_GND_top" (solid, remove dead copper, pour order 10): 1,-1 15.4,-1 15.4,-11.9 30.5,-11.9 30.5,-33 45.4,-33 46.5,-34.1 47,-34.6 47,-47 1,-47
LGND on Top Copper "Laser_GND_top" (solid, remove dead copper, pour order 4): 38.7,-3 42,-3 43.4,-5.1 45.8,-5.1 46.7,-6 46.7,-24.2 40.1,-24.3 40.1,-32.5 30.997,-32.7 30.997,-20 34,-16.997 34,-8 34,-6.6
GND on Bottom Copper "Main_GND_bottom" (solid, remove dead copper, pour order 12): 1,-1 15.4,-1 15.4,-9 17.6,-11.2 30.5,-11.2 30.5,-33.6 47,-33.6 47,-47.5 1,-47.5
LGND on Bottom Copper "Laser_GND_botom" (solid, remove dead copper, pour order 6): 38.7,-3 42,-3 43.4,-5.1 45.8,-5.1 46.7,-6 46.7,-27.5 46.7,-32.488 30.997,-32.489 30.997,-20 34,-16.997 34,-8 35.7,-8

## Keep-outs
Keep-Out Layer:
  the board outline again, w0.3

## Other copper
Top Copper:
  pour cut-out: 41.6,-16.1 42.5,-16.1 43.5,-16.1 43.5,-17.6 41.96,-17.6 41.6,-17.6
  region net GND: 27.8,-37.8 33,-37.8 33,-43 27.8,-43
  region net LAS_POWER: 39.825,-21.625 39.675,-21.625 39.2,-22.1 39.2,-23.1 40.1,-23.1 39.925,-22.925 39.825,-22.825
Bottom Copper:
  pour cut-out: 13.7,-26.4 13.7,-22.4 13.2,-21.9 11.6,-21.9 9.5,-24.2 9.5,-26.4

## Silkscreen, mask and mechanical layers (free items; w line width, h text height)
Top Overlay:
  text "+5V" at 38.6,-4.9 h1 r90
  text "GND" at 6.3,-6 h1
Bottom Overlay:
  text "OpenTOFLidar / 02.2020 v4B" at 44.4,-4.8 h1.2
  text "CLK" at 24.7,-42.9 h0.9 r270
  text "G" at 26.9,-44 h1.2 r270
  text "TX" at 29.3,-44 h0.9 r270
  text "RX" at 31.8,-44 h0.9 r270
Bottom Mask:
  region: 1.8,-5.6 1.8,-15.5 0.9,-15.5 0.9,-5.6
  region: 15.45,-1 15.45,-15.1 14.5,-15.1 14.5,-1
  region: 15.4,-14.65 1,-14.65 1,-15.5 15.4,-15.5